# Altium PCB python project v2.0.PcbDoc (part 1 of 2)
Units mil, origin at the board's own origin, x right, y up, seen from the top; angles counter-clockwise.
Board outline 4842.52 x 1803.15 mil, 8 copper layers (L1, L2, L3(GND), L4(PWR), L5(GND), L6, L7, L8), stack 66.302 mil thick; 259 components, 287 nets, 1829 pads, 135 vias.
Unrouted connection lines stored in the file: 99.
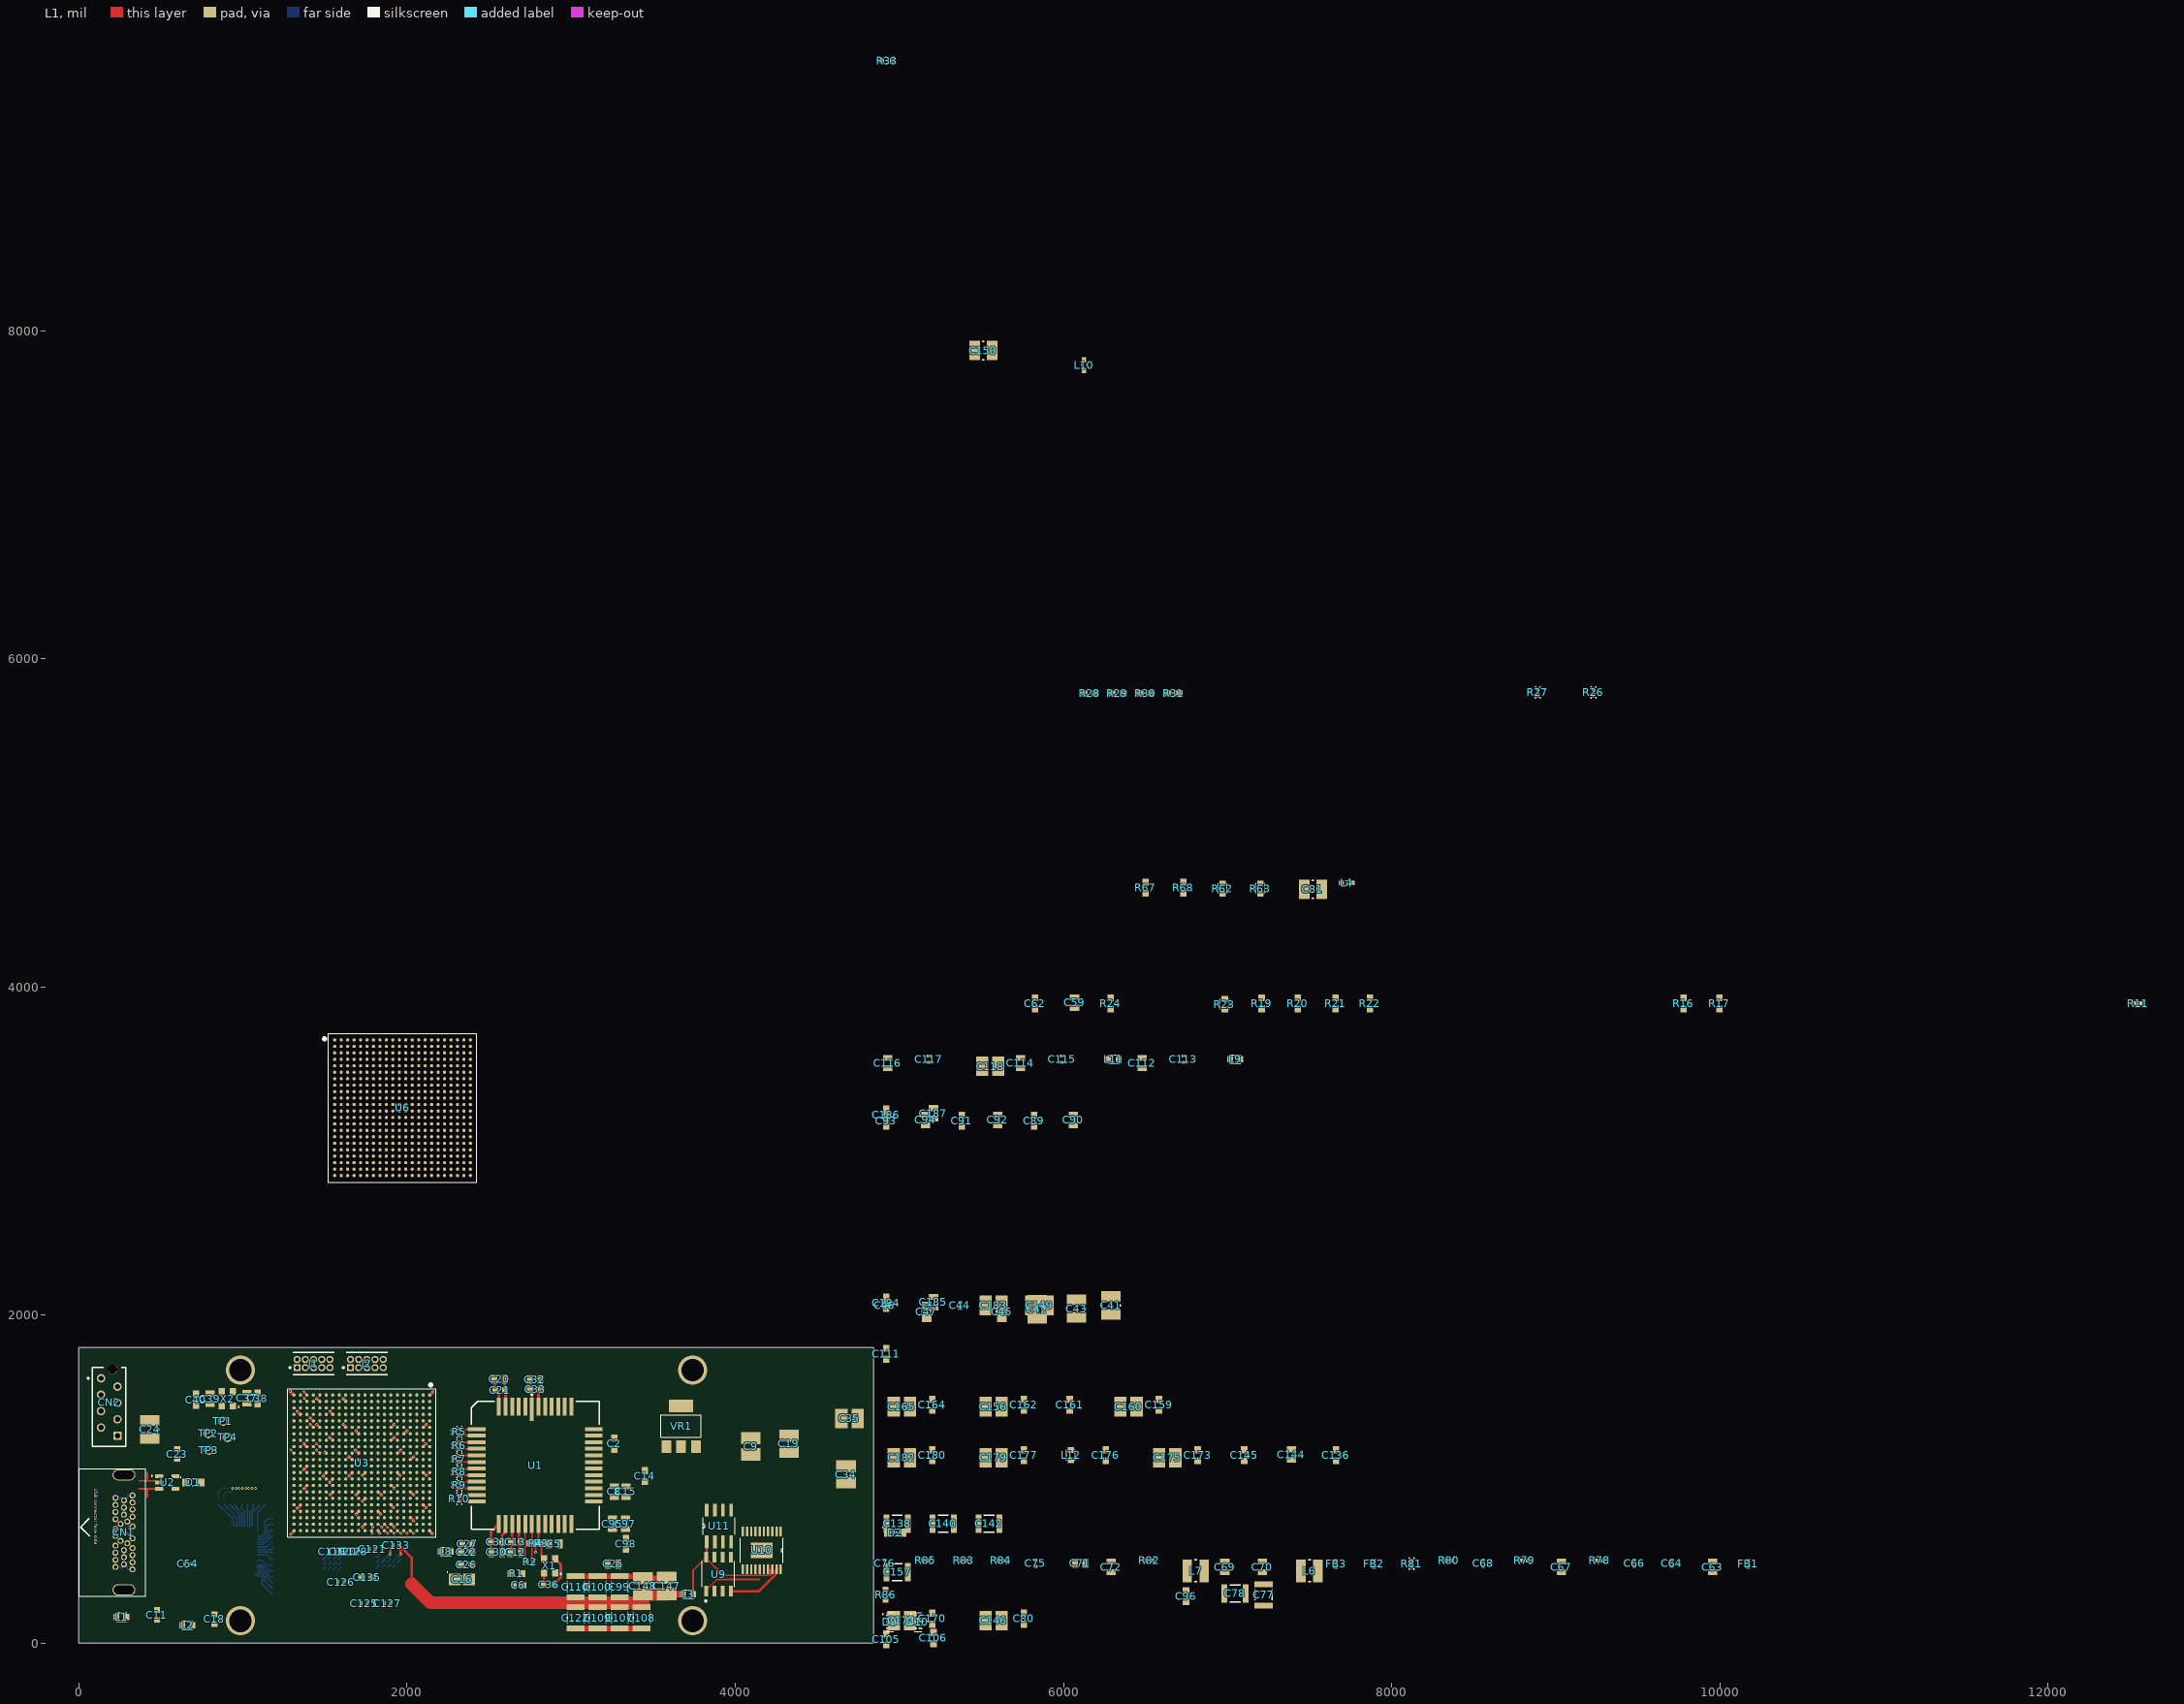
[diagram p0: L1 view]
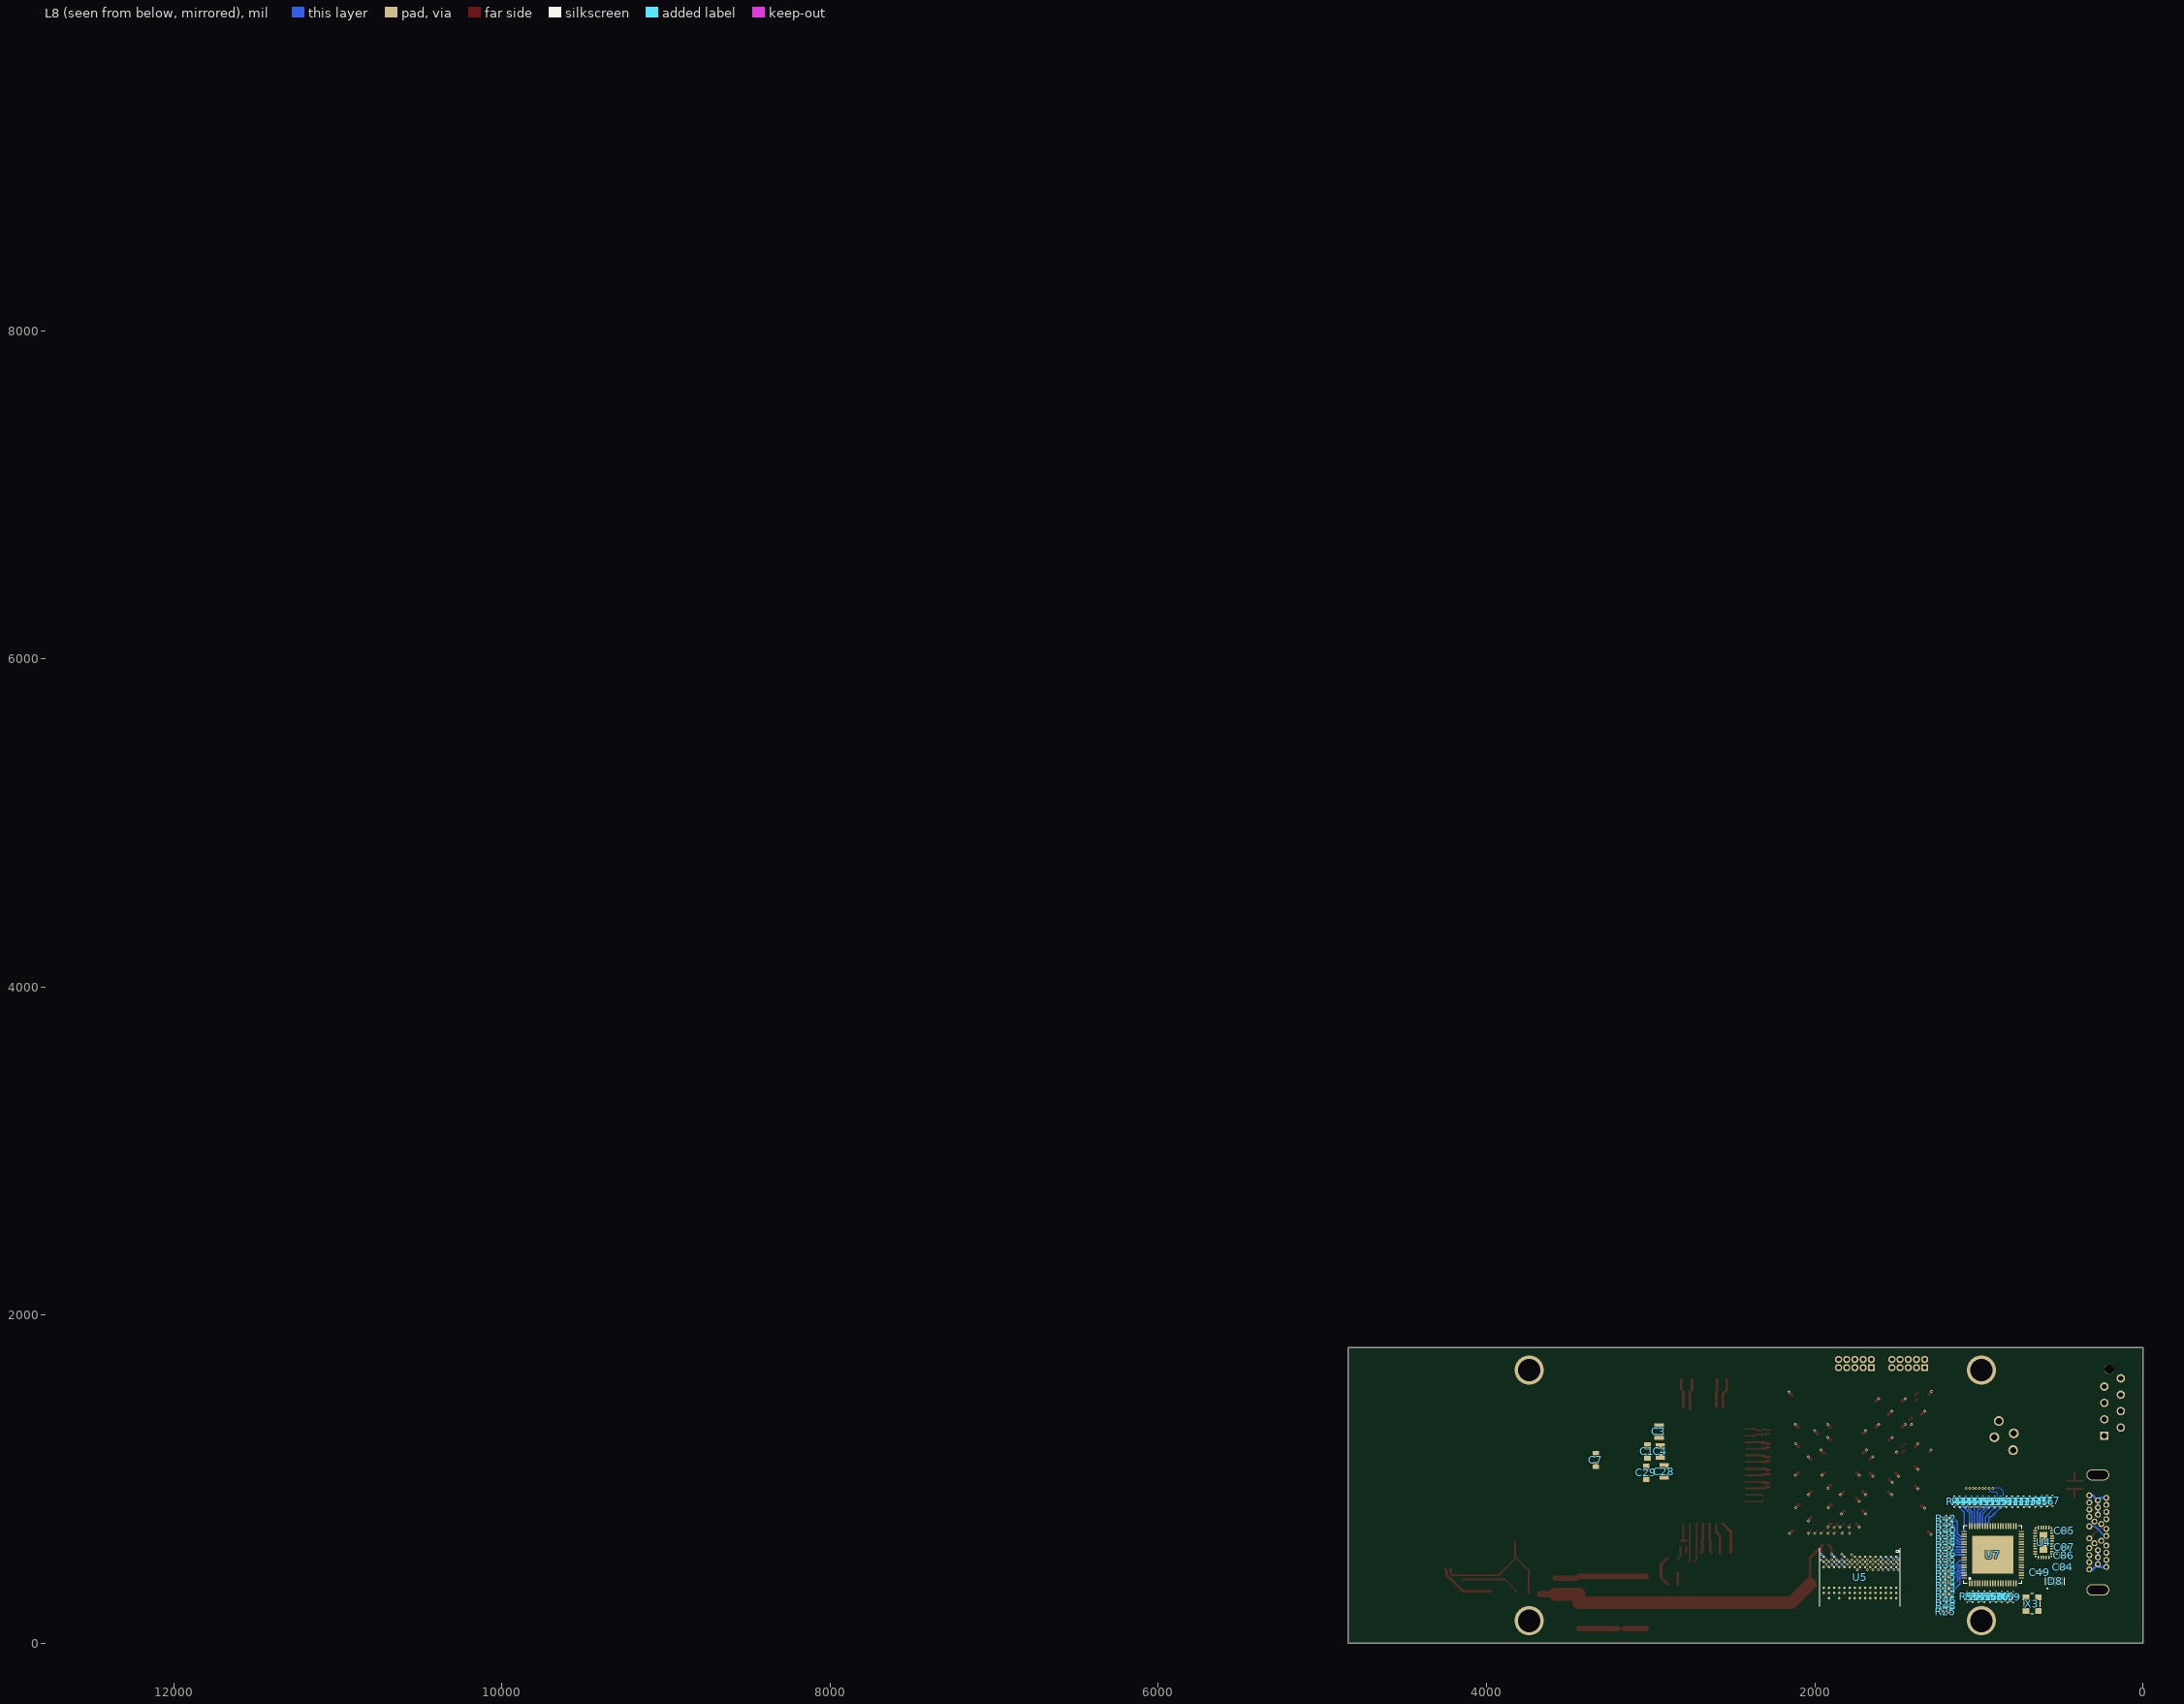
[diagram p1: L8 view, seen from below]
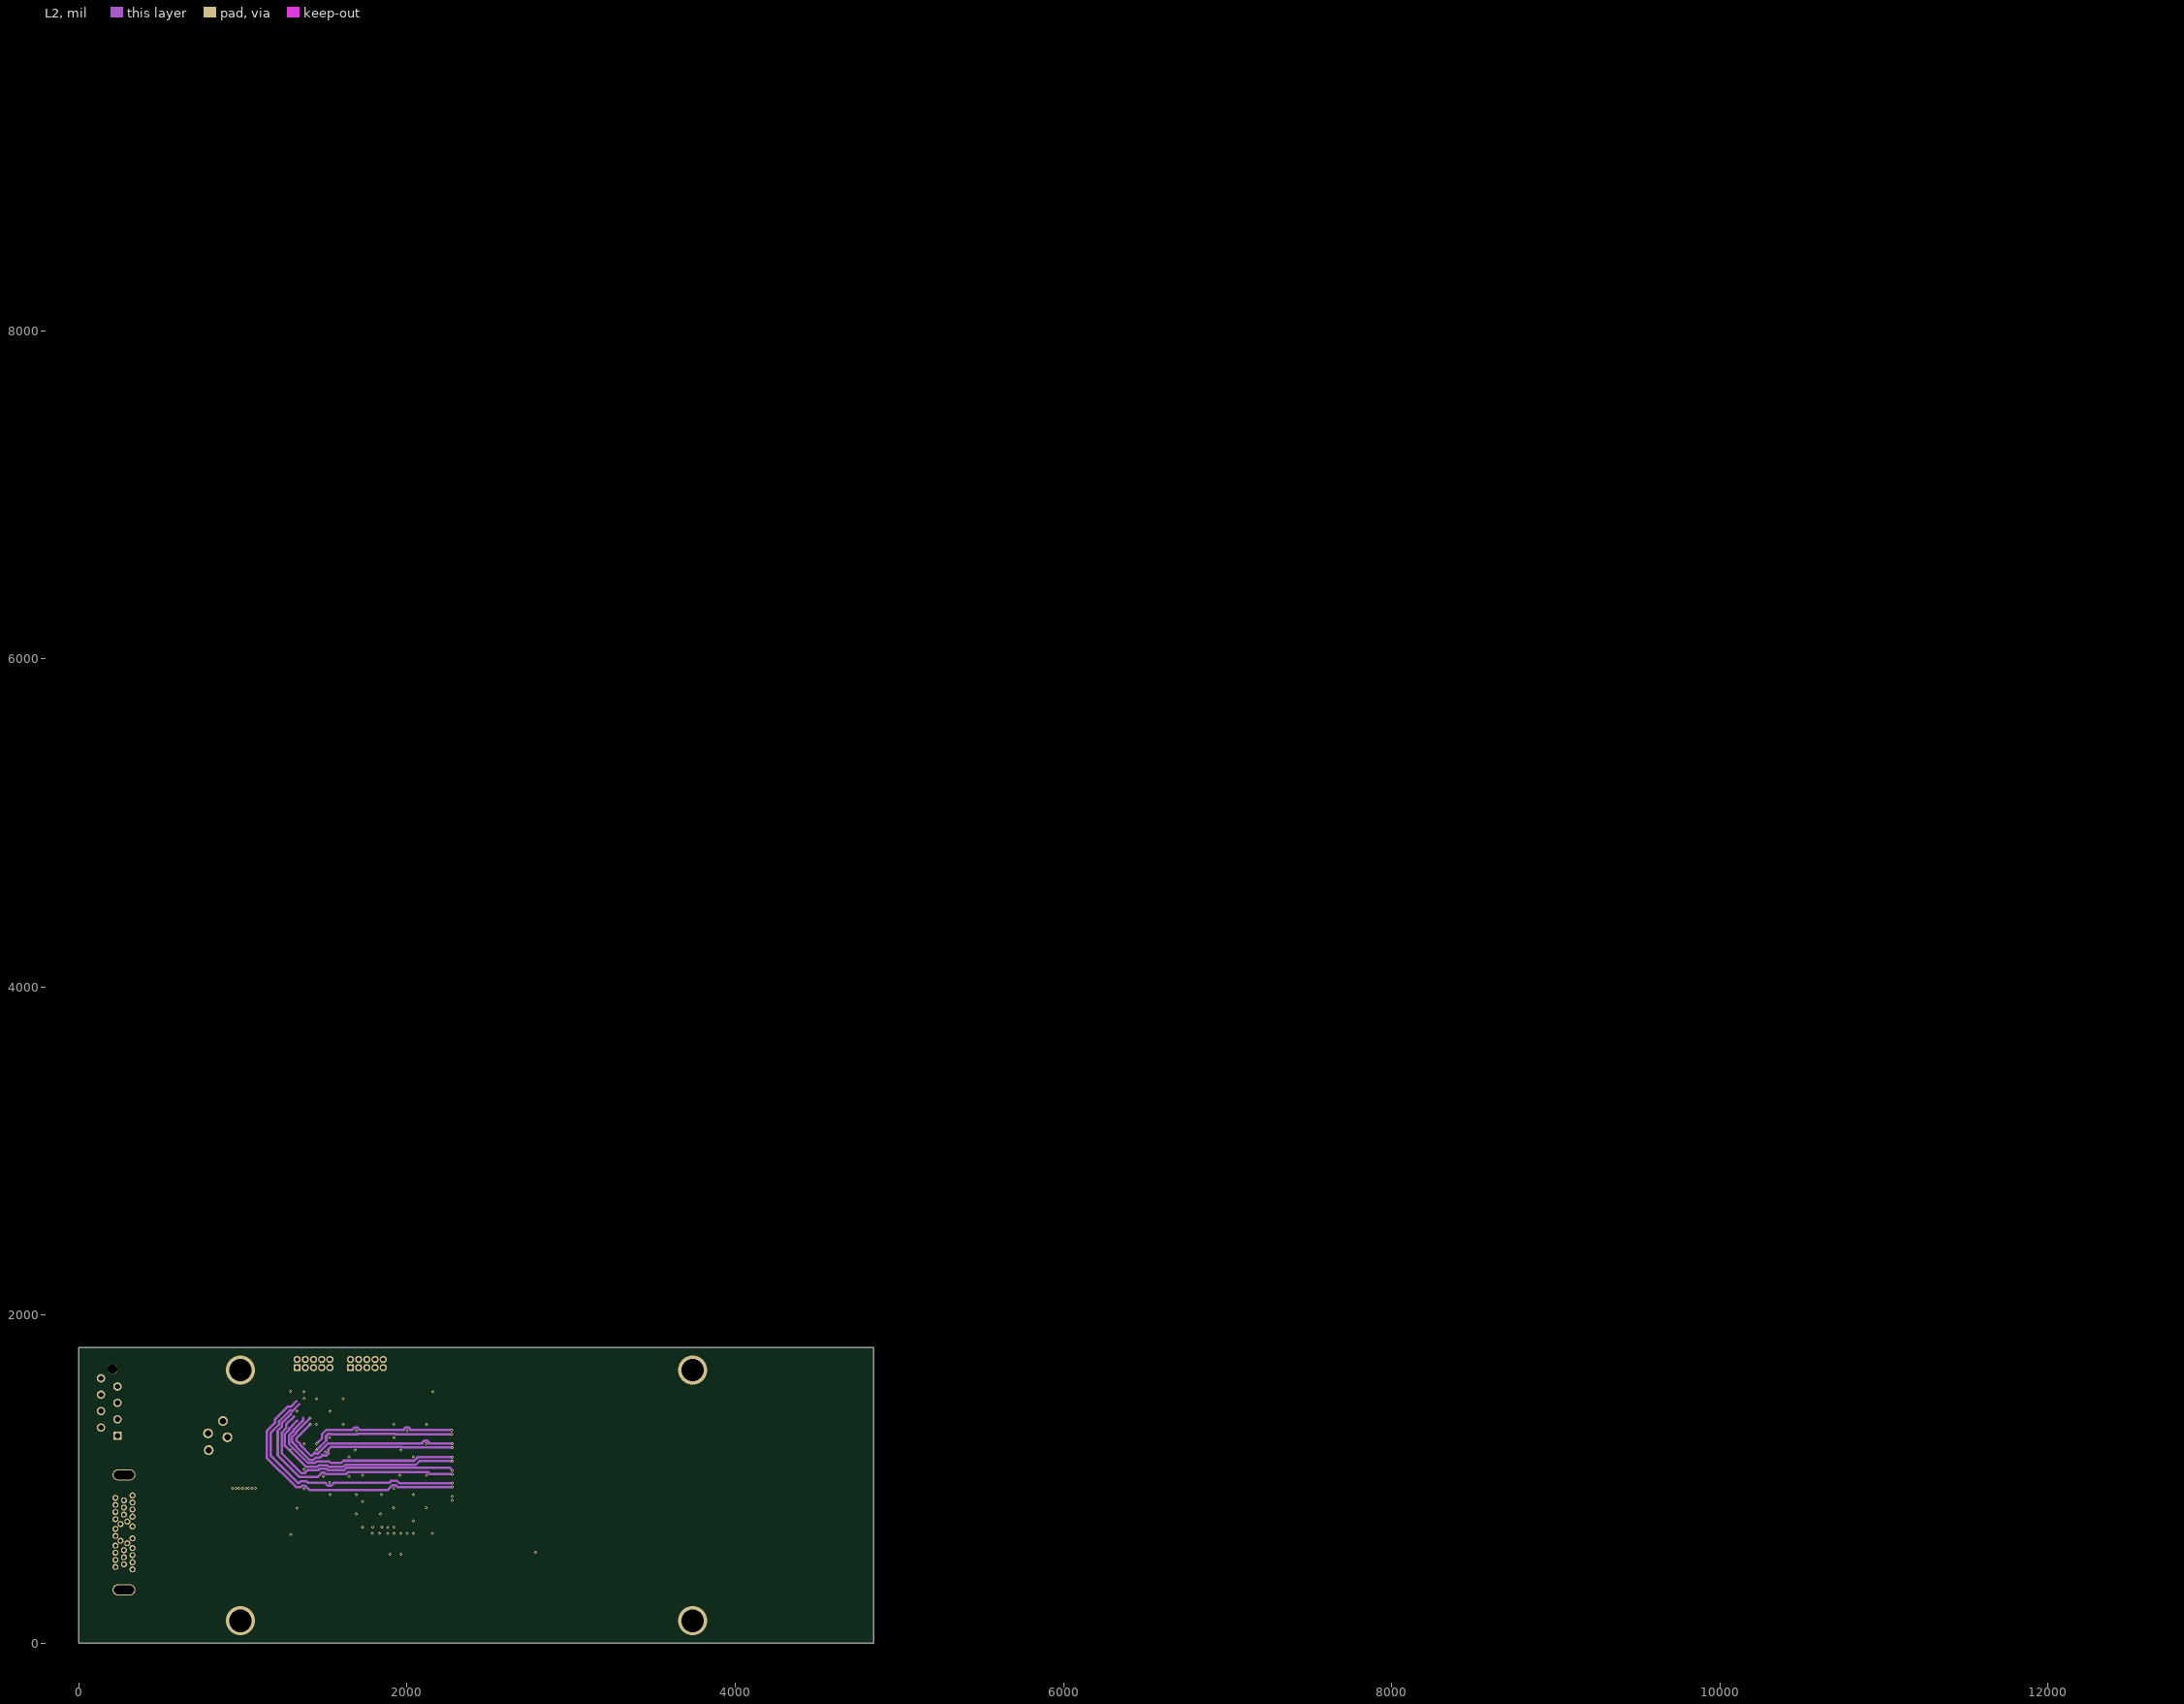
[diagram p2: L2]
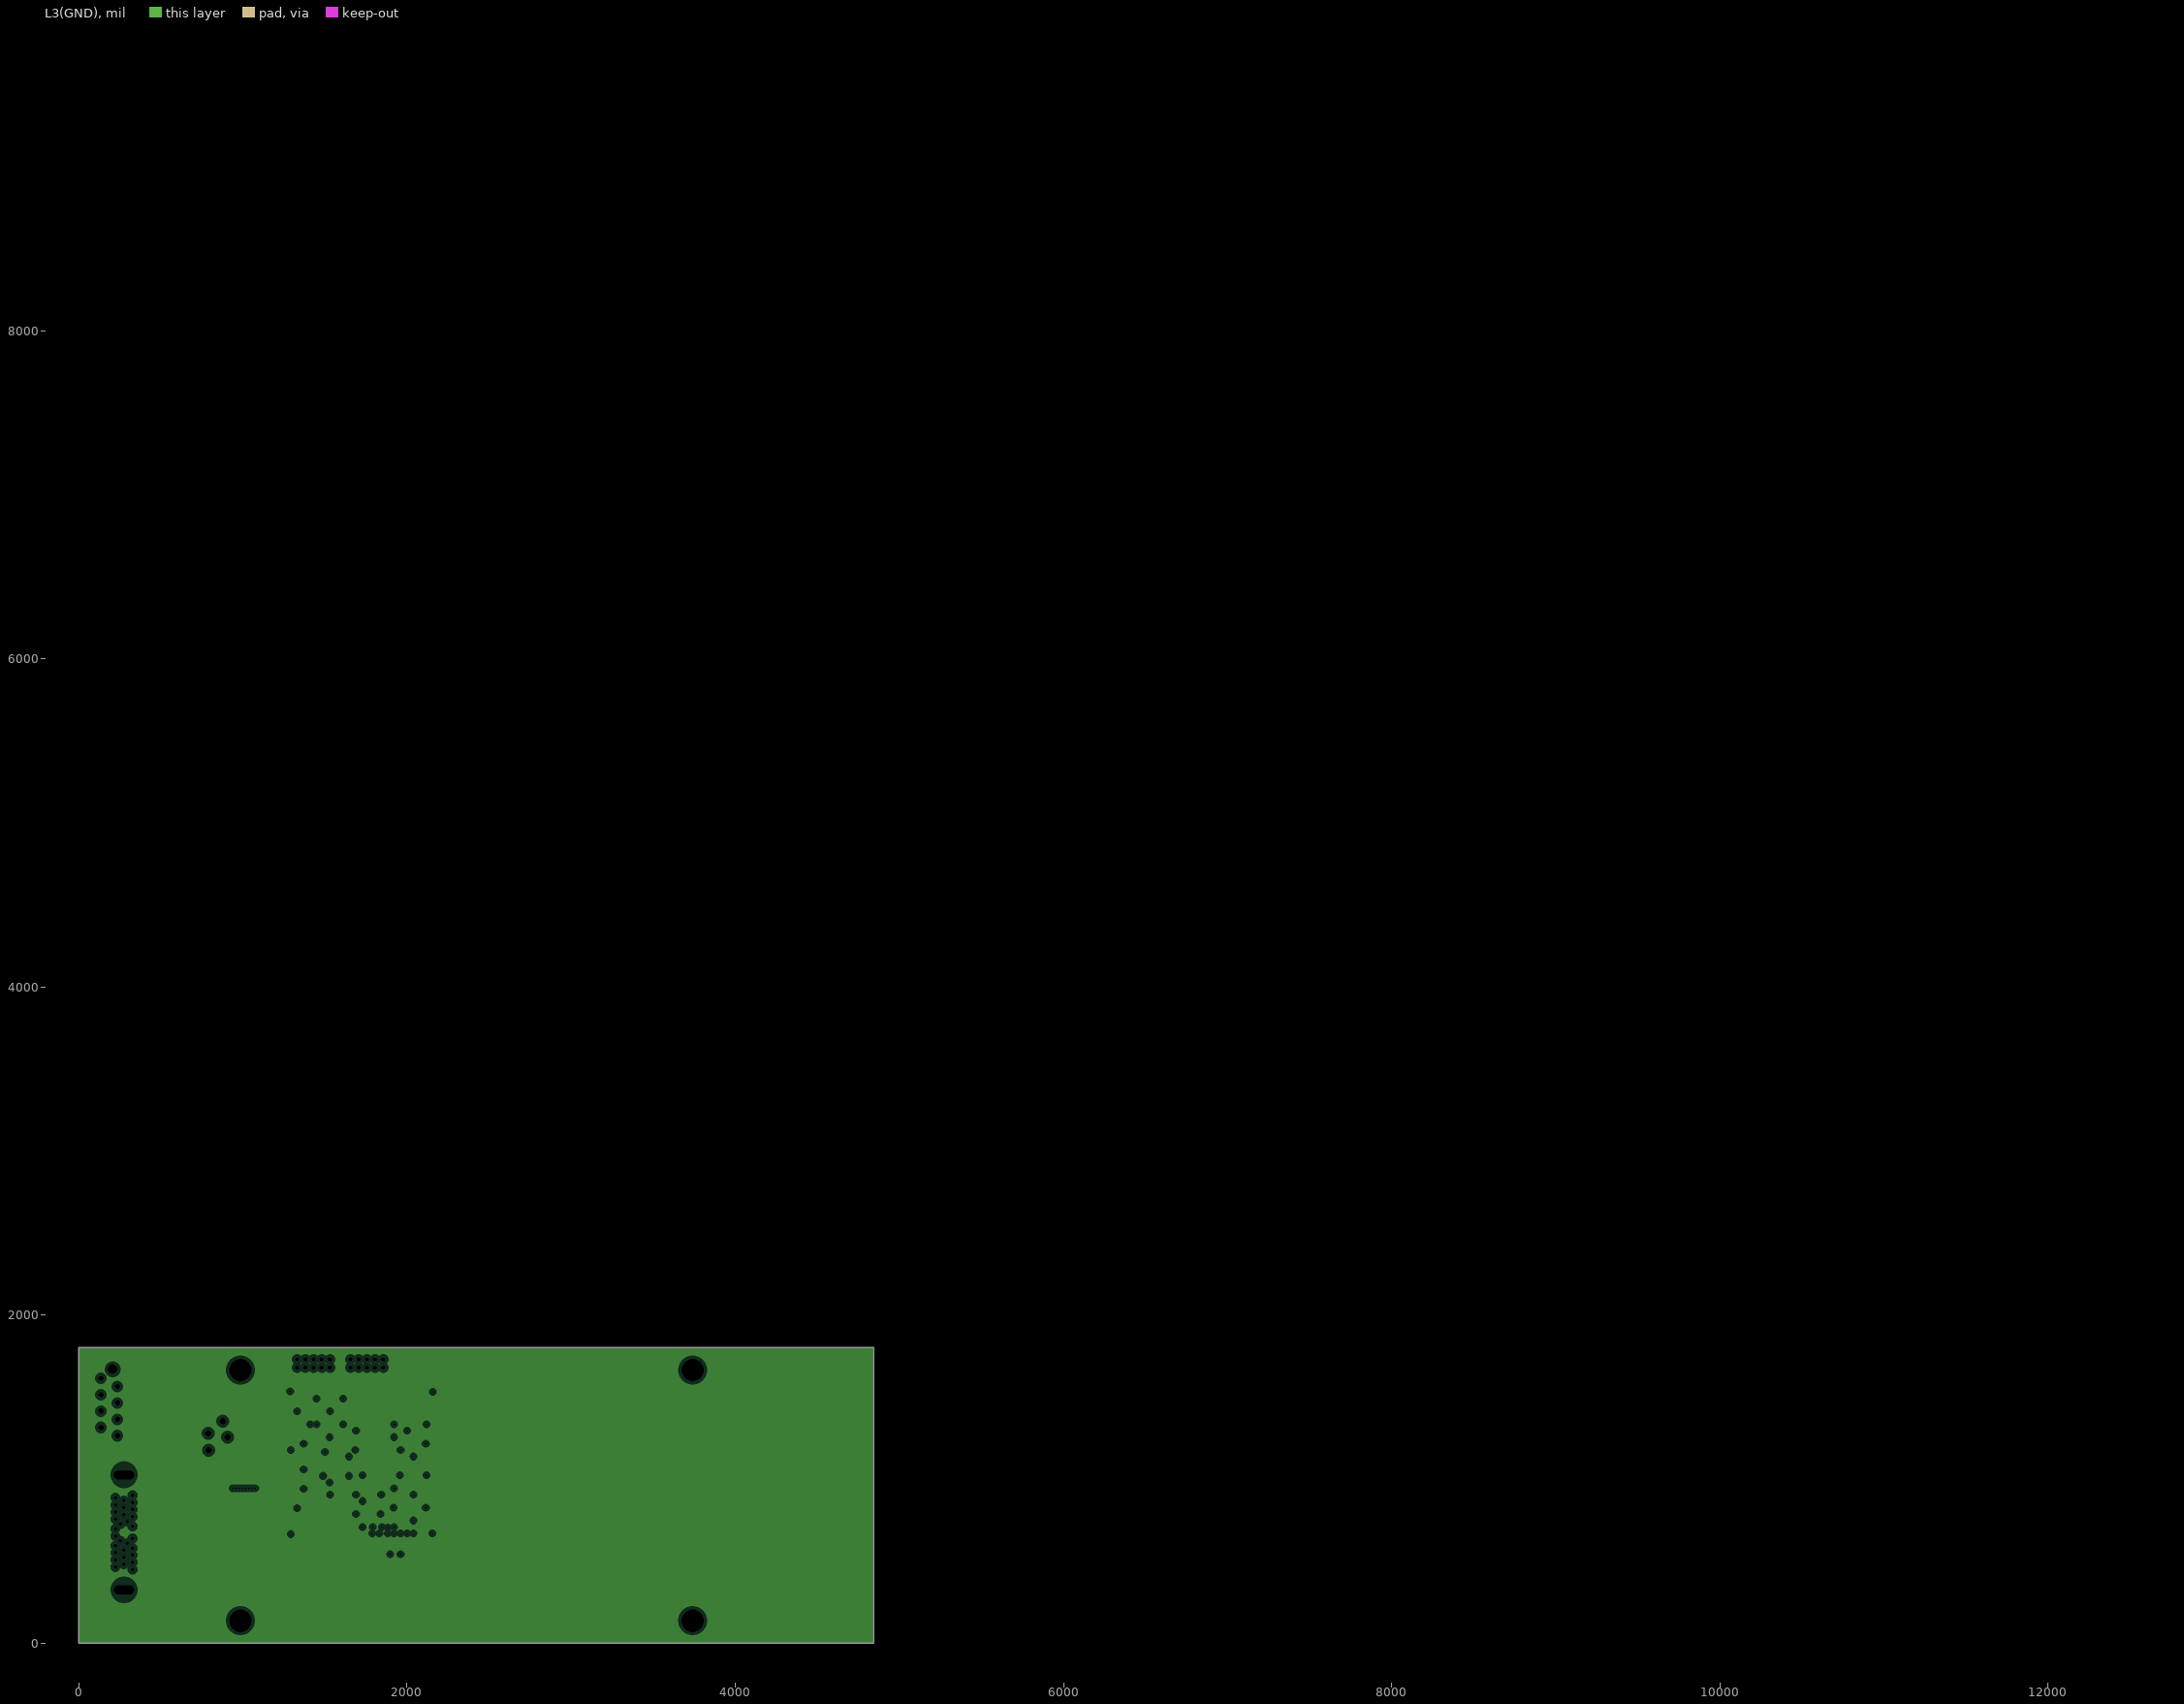
[diagram p3: L3(GND), clearances drawn from the general rule]
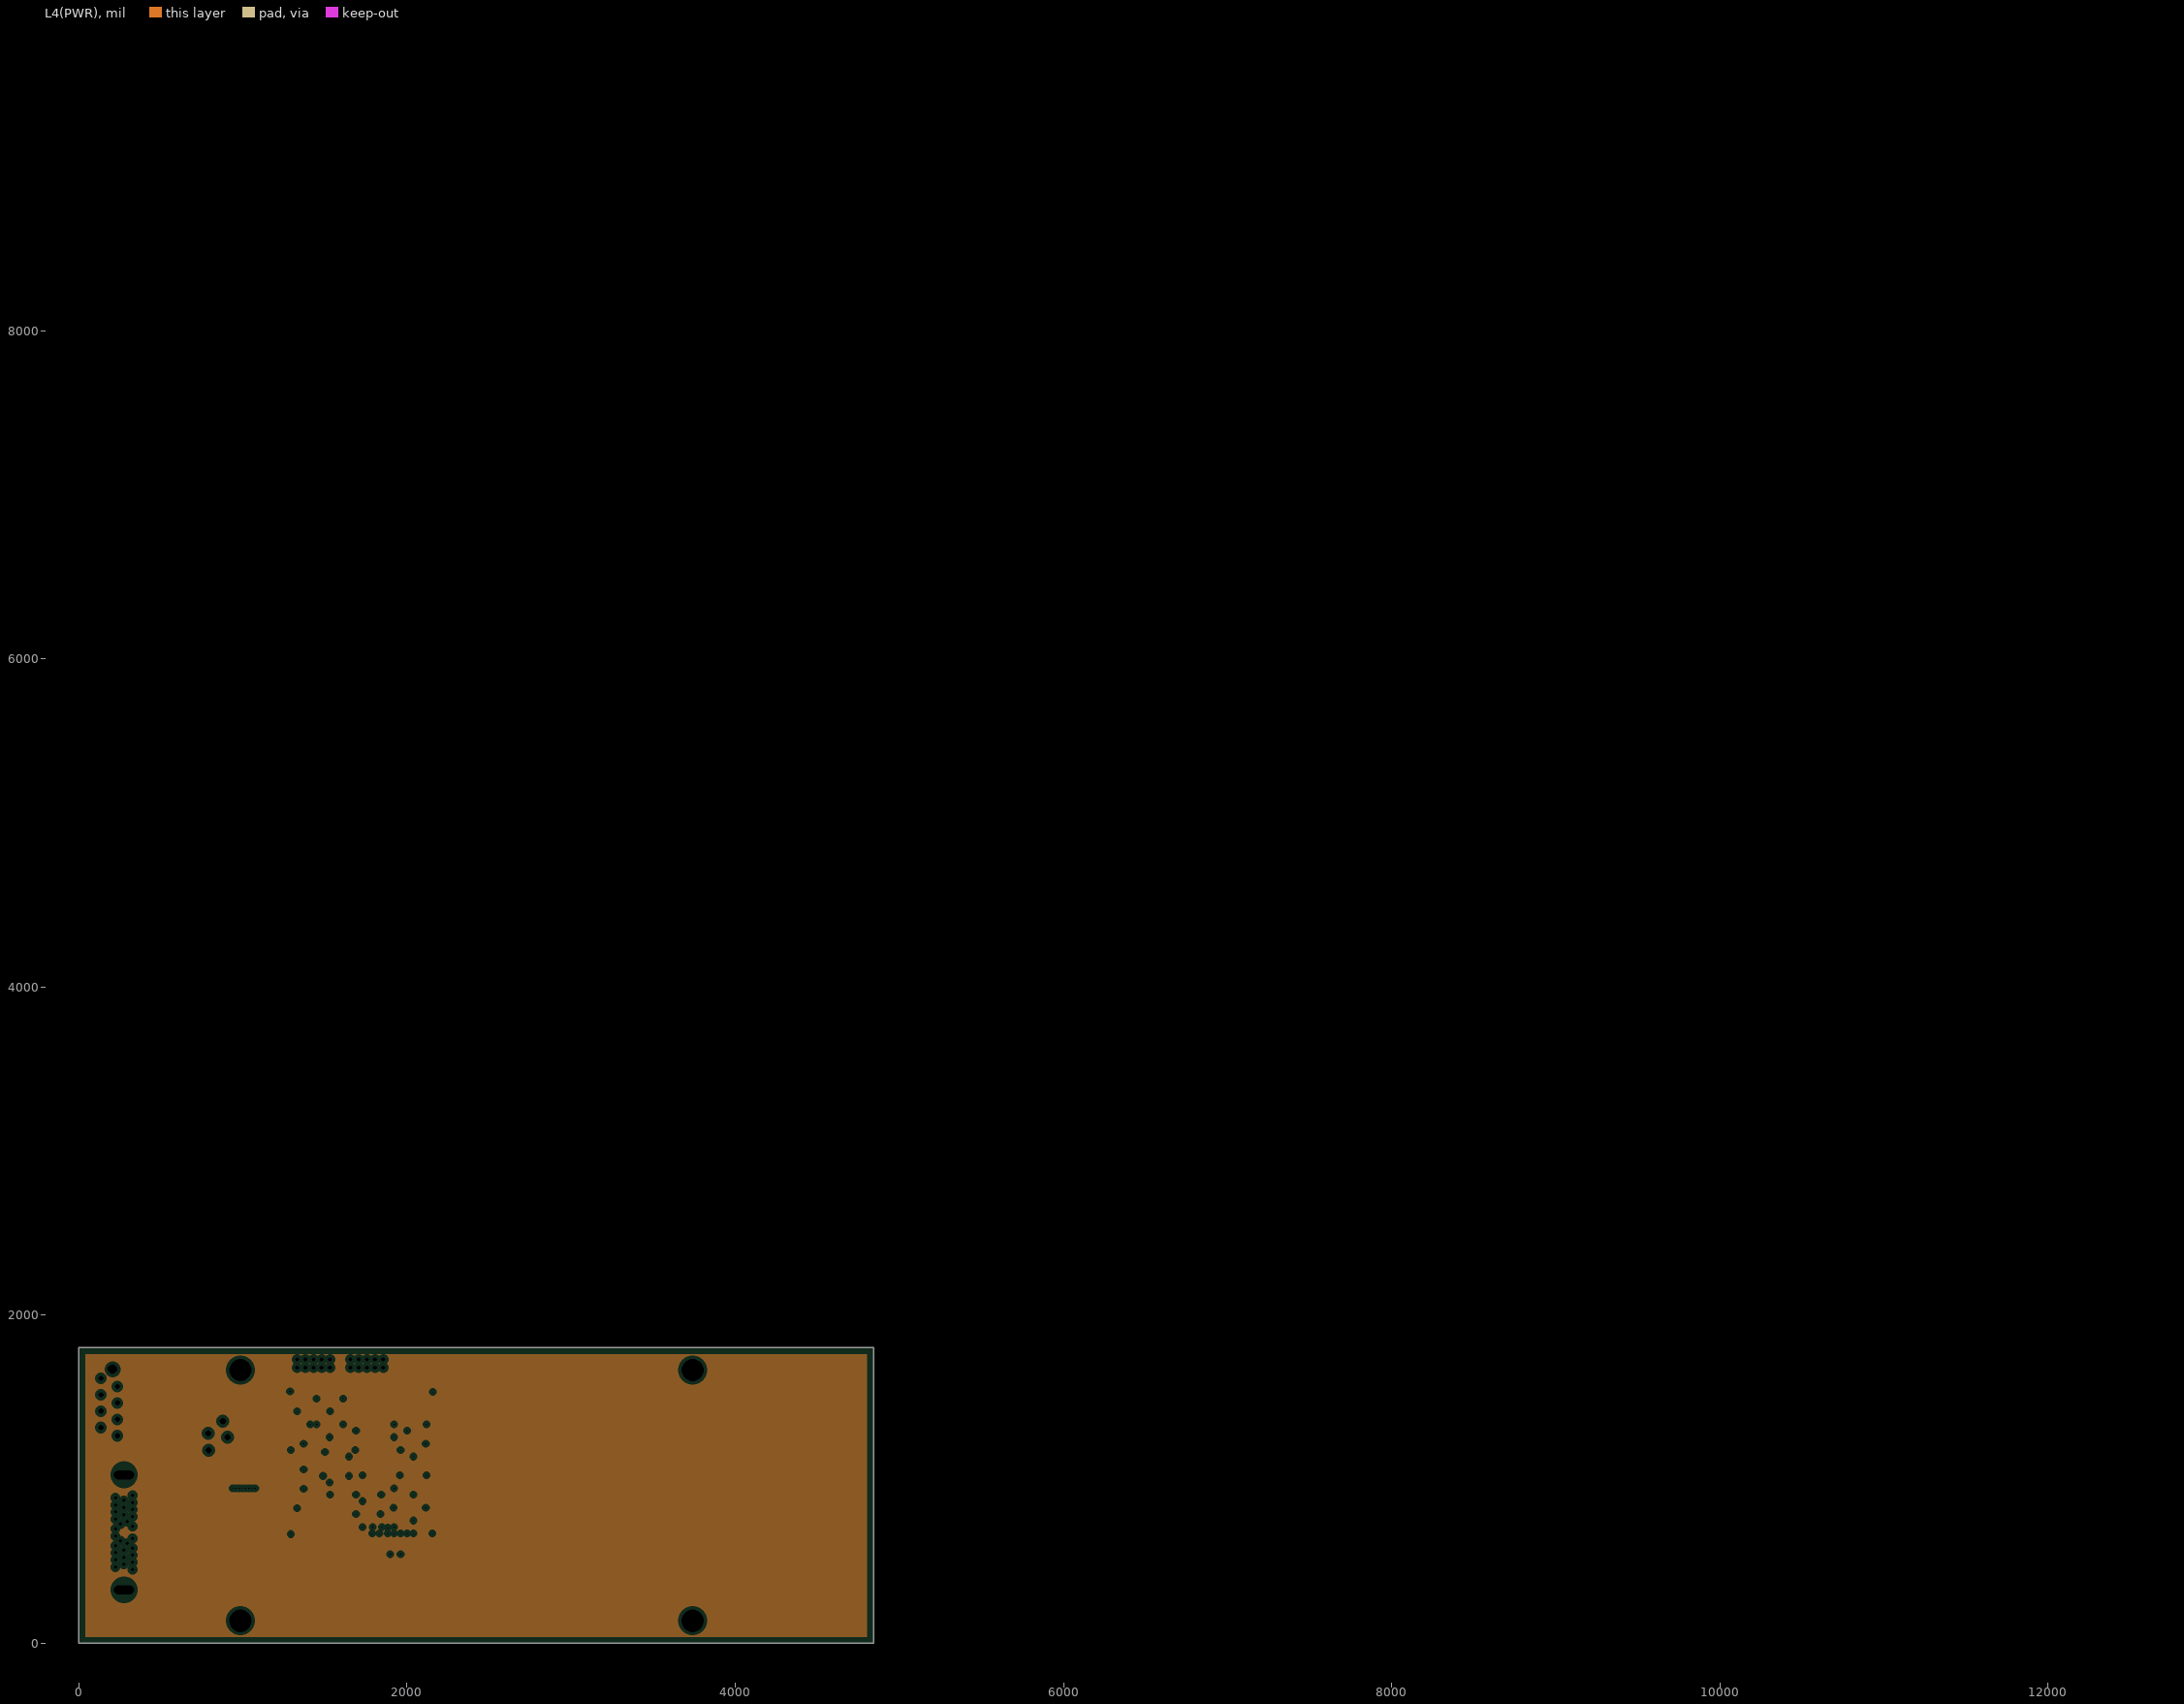
[diagram p4: L4(PWR), clearances drawn from the general rule]
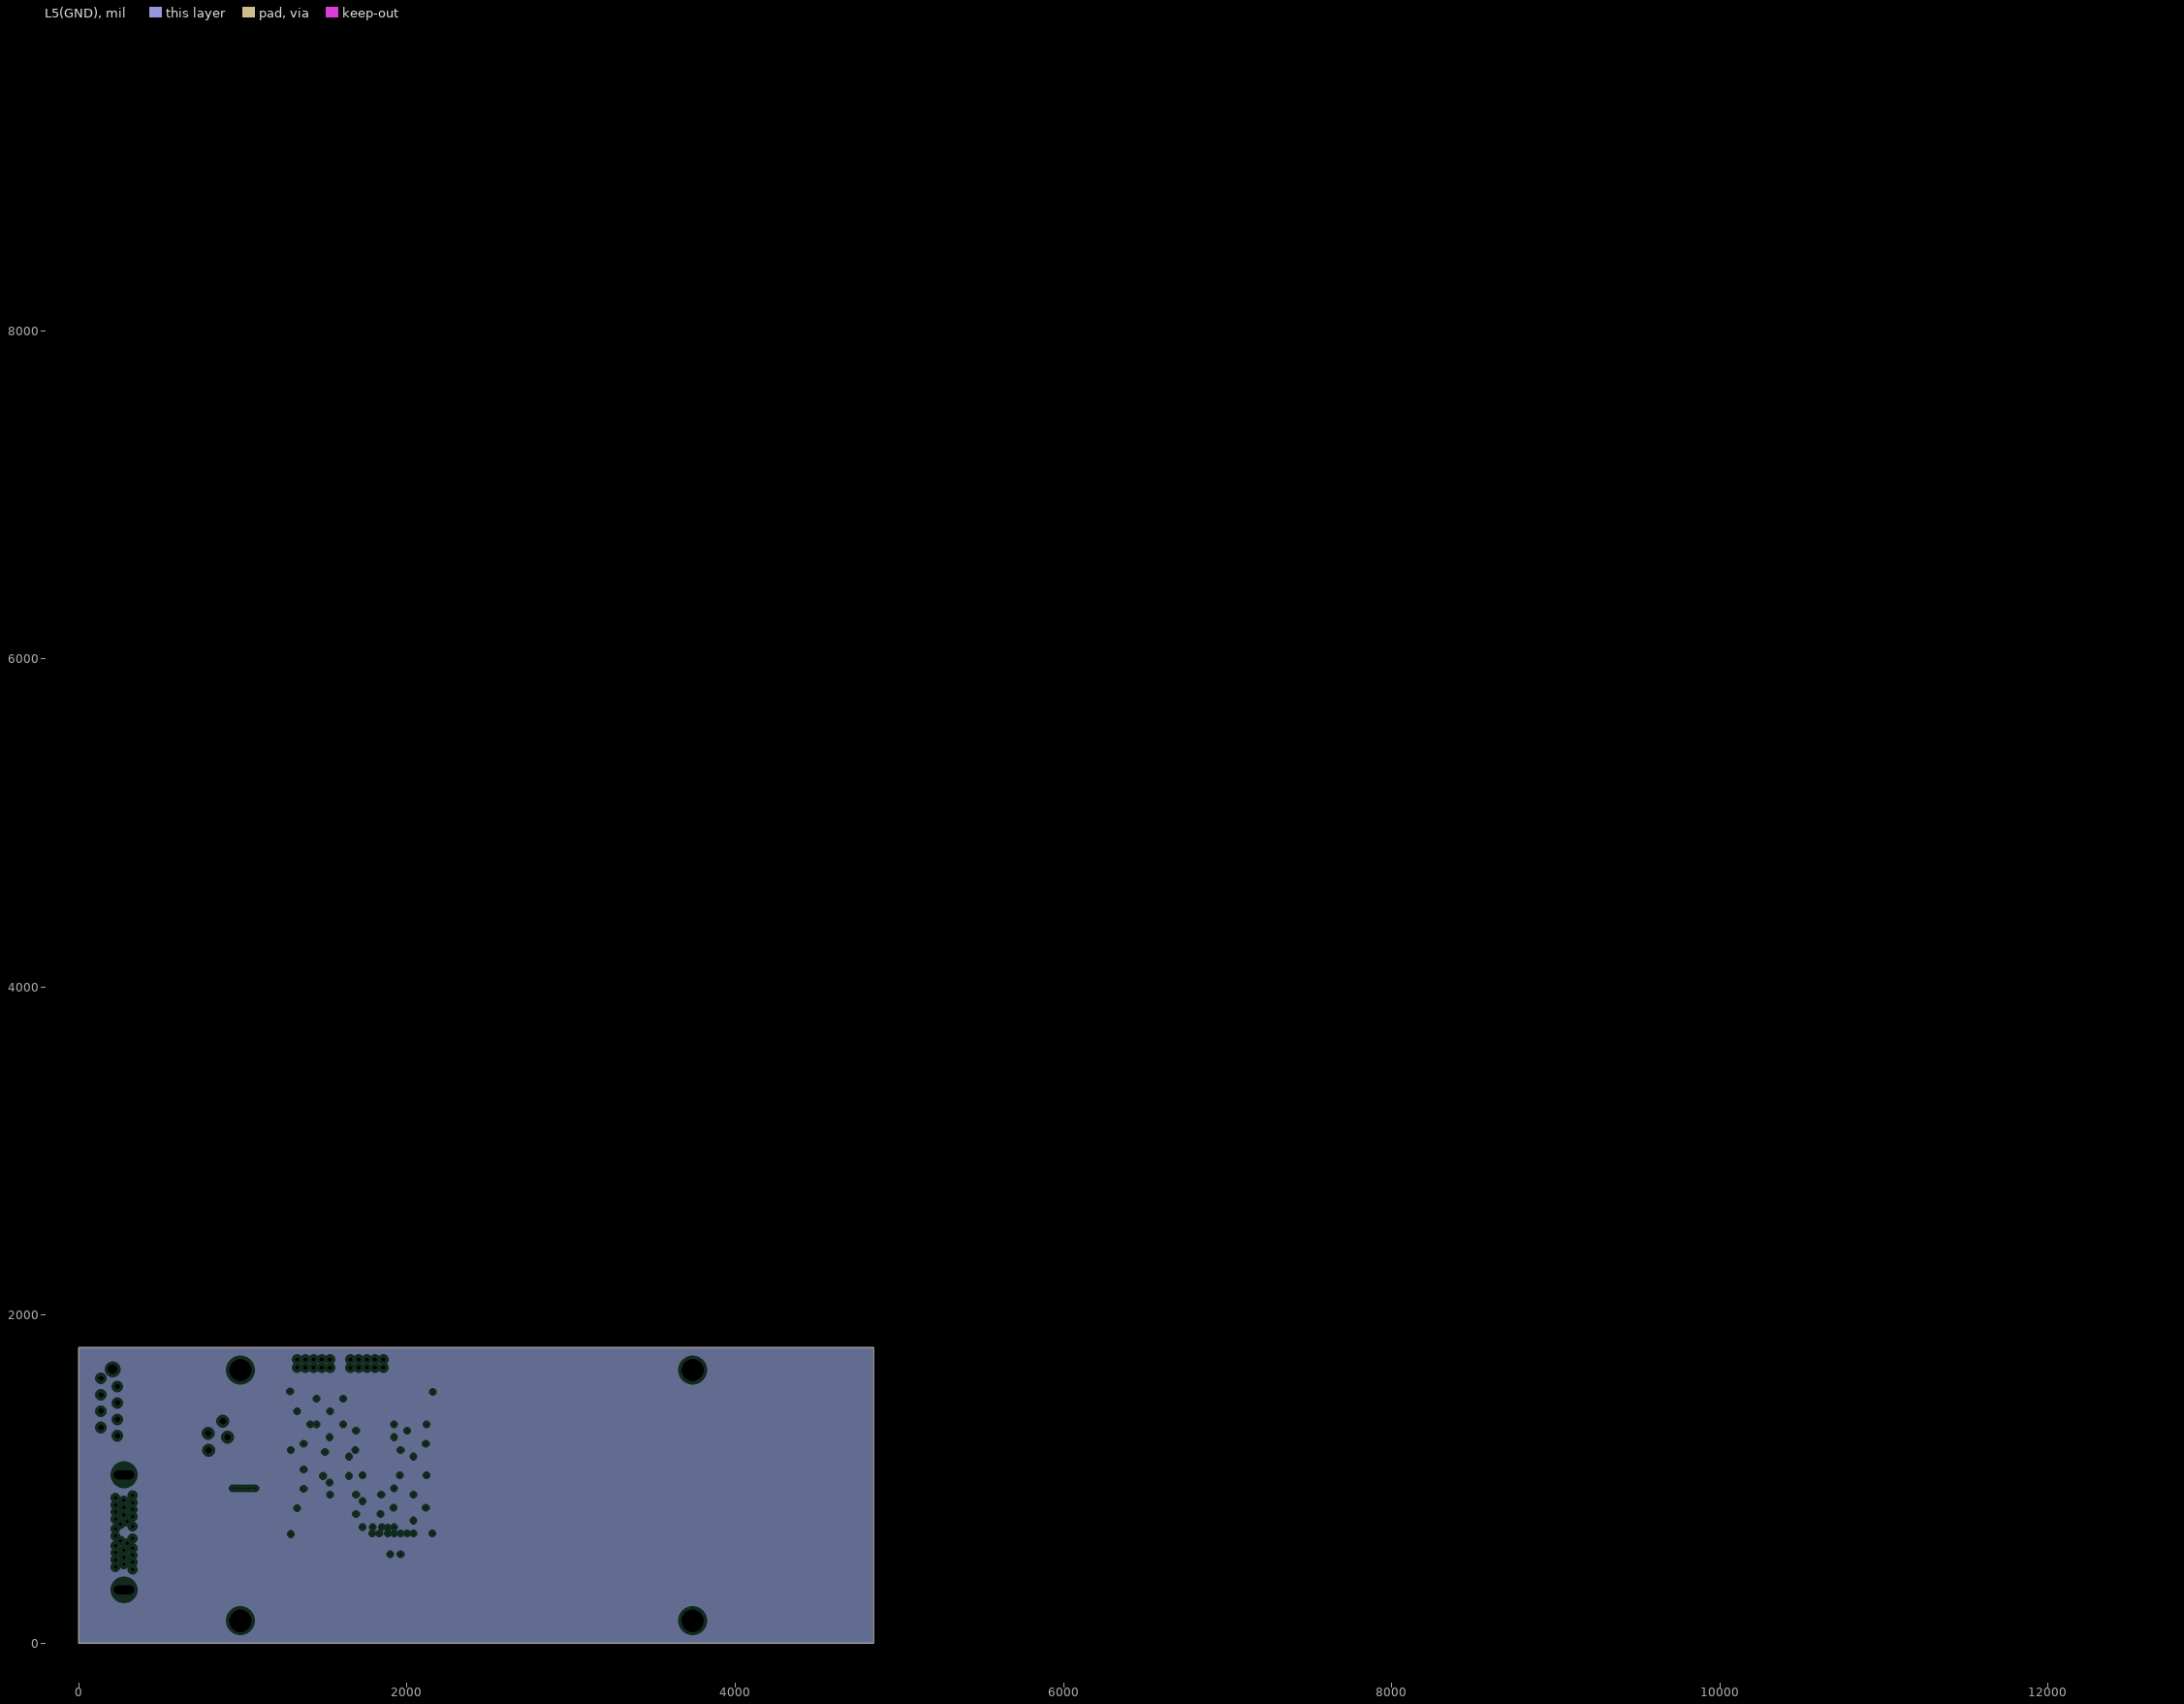
[diagram p5: L5(GND), clearances drawn from the general rule]
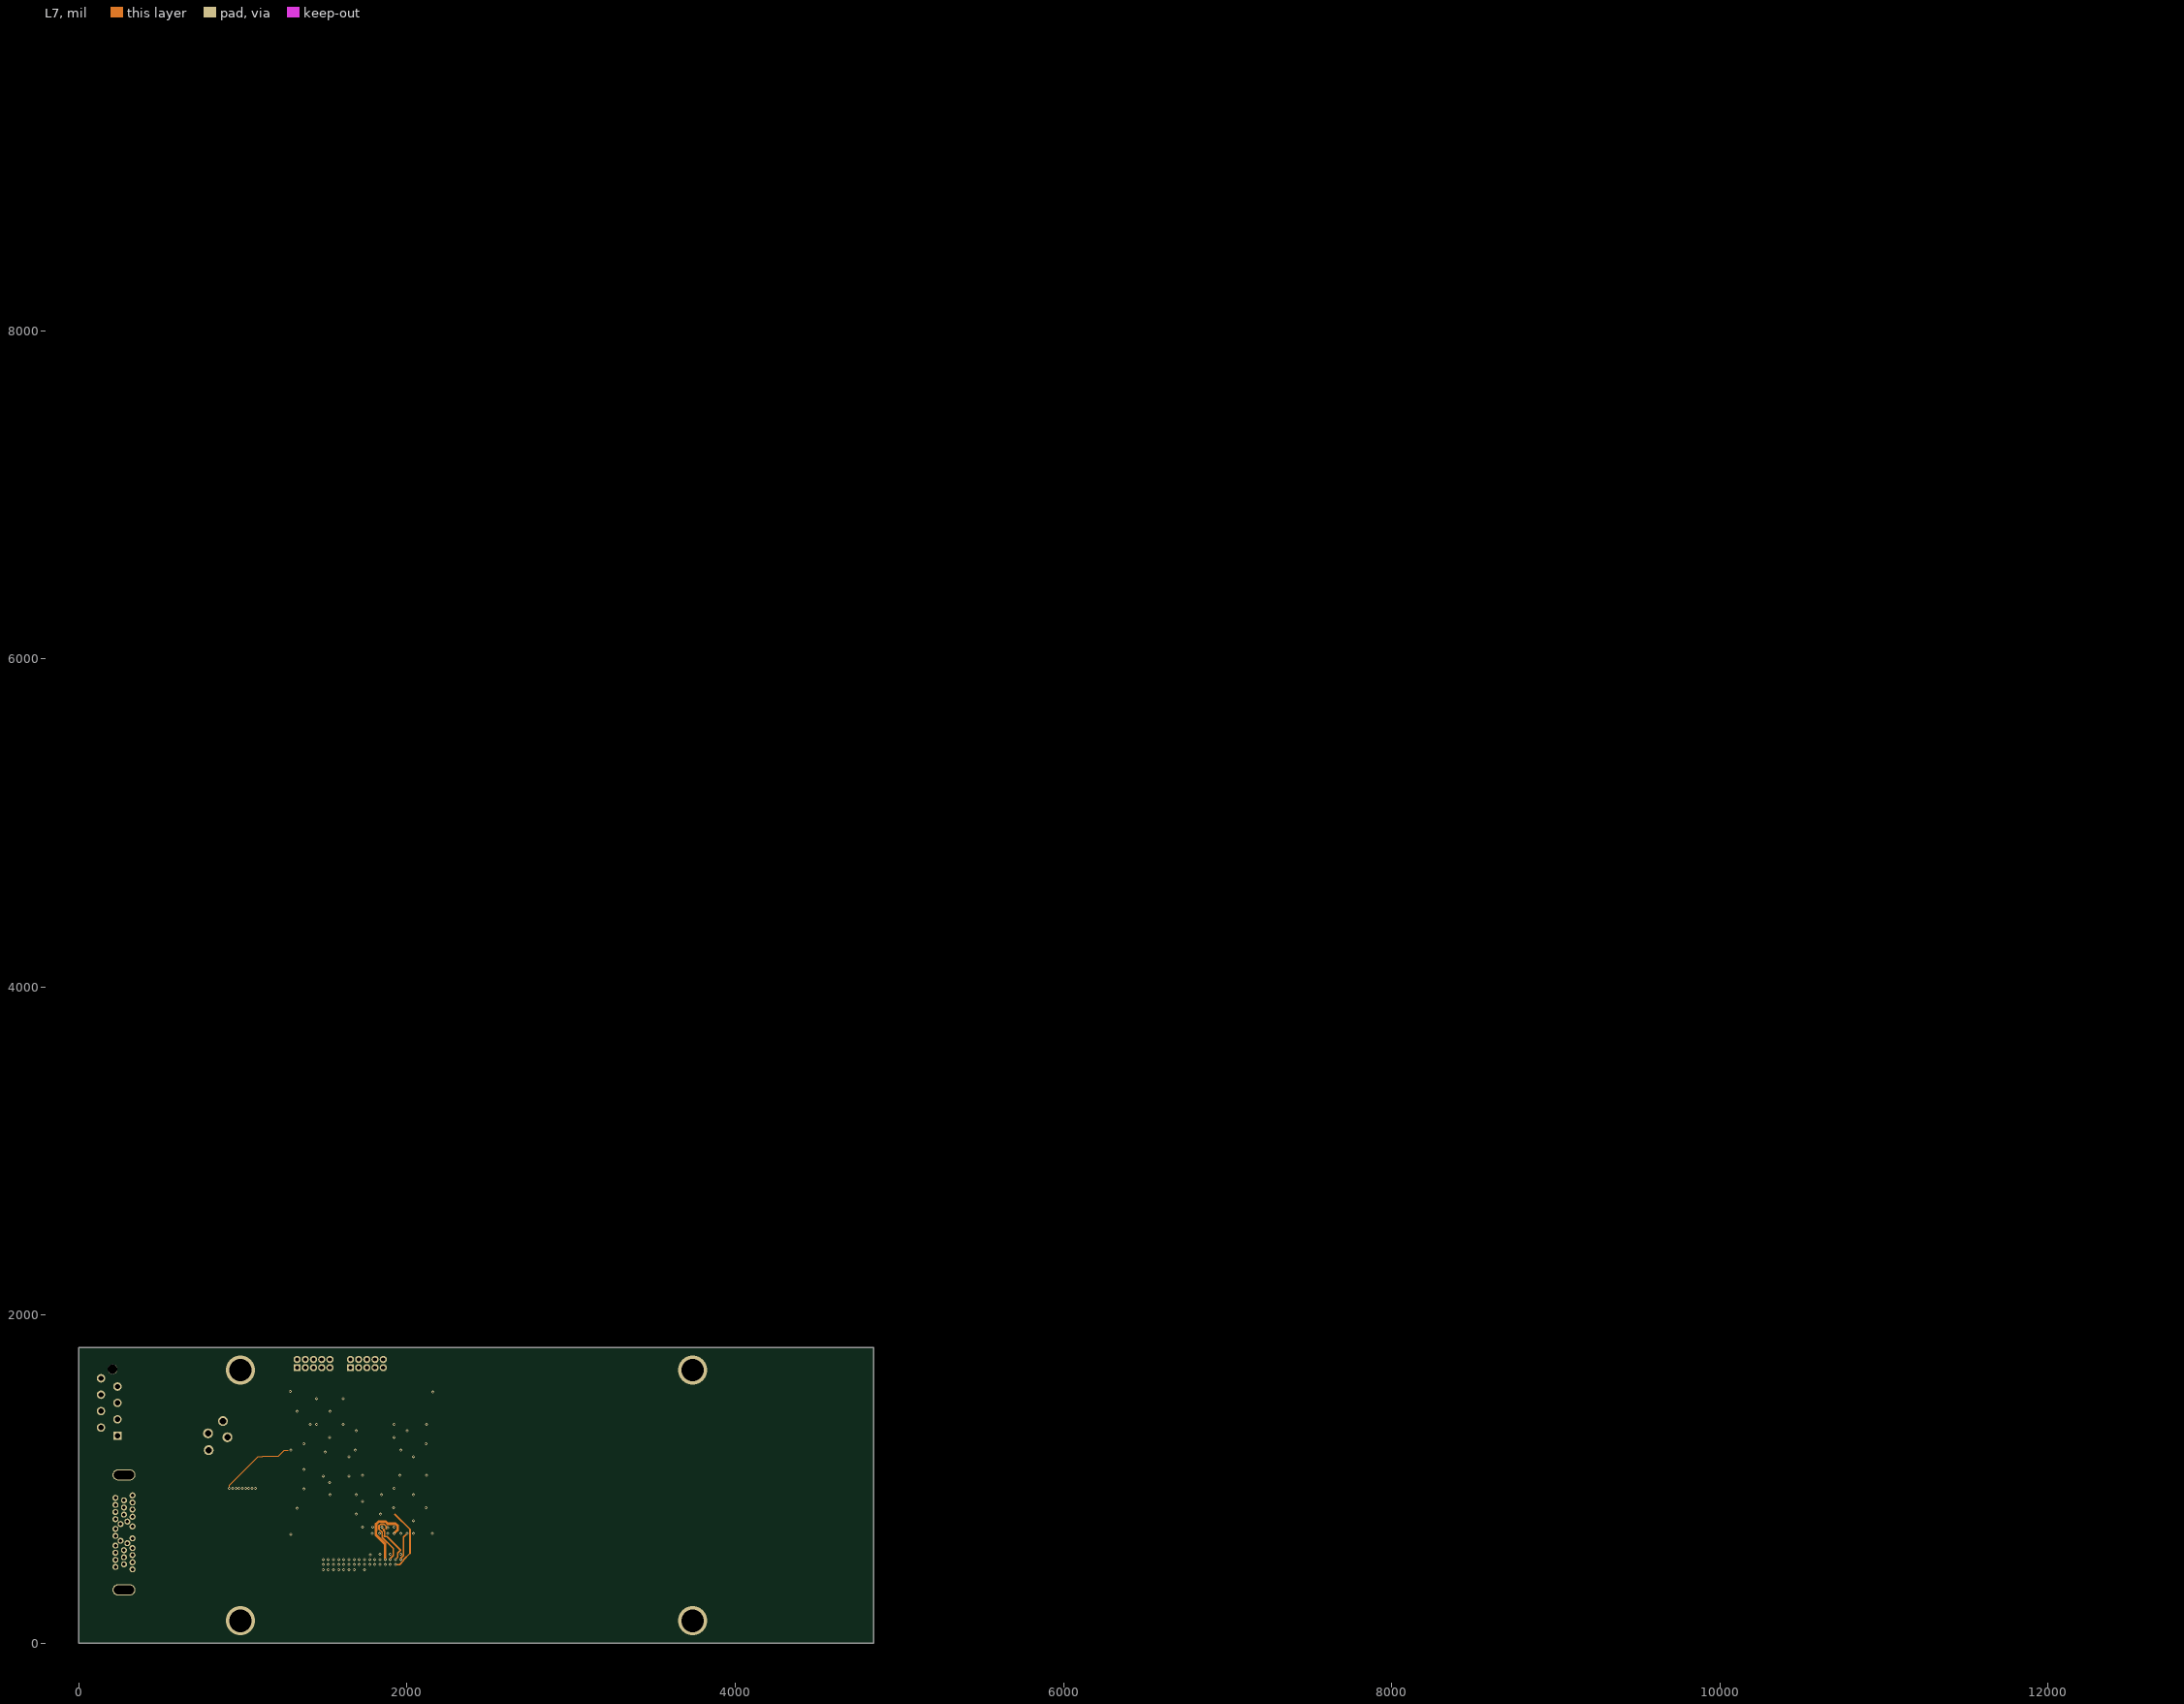
[diagram p6: L7]

## Layer stack, top to bottom
Top Solder: solder mask 0.4, Solder Resist, Dk 3.5
L1: signal copper 1.4
Dielectric 1: core 10, FR-4, Dk 4.2
L2: signal copper 1.417
Dielectric 2: prepreg 5, Dk 4.2
L3(GND): plane copper 1.417
Dielectric 3: core 10, Dk 4.2
L4(PWR): plane copper 1.417
Dielectric 4: prepreg 5, Dk 4.2
L5(GND): plane copper 1.417
Dielectric 5: core 10, Dk 4.2
L6: signal copper 1.417
Dielectric 6: prepreg 5, Dk 4.2
L7: signal copper 1.417
Dielectric 7: core 10, Dk 4.2
L8: signal copper 1.4
Bottom Solder: solder mask 0.4, Solder Resist, Dk 3.5

## Board outline
0,0 4842.52,0 4842.52,1803.15 0,1803.15

## Design rules (kind name [scope] priority, off if disabled: settings)
Clearance [All] p1: gap=3.94 ignorepadtopadclearanceinfootprint=FALSE
DiffPairsRouting [All] p1: maxlimit=10 minlimit=10 mostfreqgap=10 toplayer_minwidth=15 toplayer_maxwidth=15 toplayer_prefwidth=15 midlayer1_minwidth=15 midlayer1_maxwidth=15 midlayer1_prefwidth=15 midlayer2_minwidth=15 midlayer2_maxwidth=15 midlayer2_prefwidth=15 midlayer3_minwidth=15 midlayer3_maxwidth=15 midlayer3_prefwidth=15 bottomlayer_minwidth=15 bottomlayer_maxwidth=15 bottomlayer_prefwidth=15 maxuncoupledlength=500
PlaneClearance [All] p1: clearance=20
PlaneConnect [All] p1: planeconnectstyle=Relief reliefexpansion=20 reliefentries=4 reliefconductorwidth=10 reliefairgap=10
PolygonConnect [All] p1: connectstyle=Relief reliefconductorwidth=10 reliefentries=4 polygonreliefangle="90 Angle" airgapwidth=10
RoomDefinition Sheet1 [InComponentClass('Sheet1')] p1: confinementstyle=ConfineIn formatcopy=TRUE lockcomponents=FALSE outline 4888.49,2288.34 6447.54,2288.34 6447.54,3390.7 4888.49,3390.7
RoomDefinition [08]-DDR2_FPGA_INTERFACE [InComponentClass('[08]-DDR2_FPGA_INTERFACE')] p2: confinementstyle=ConfineIn formatcopy=TRUE lockcomponents=FALSE outline 4888.49,1363.14 6794,1363.14 6794,1622.99 4888.49,1622.99
RoomDefinition [06]-DDR2_INTERFACE [InComponentClass('[06]-DDR2_INTERFACE')] p3: confinementstyle=ConfineIn formatcopy=TRUE lockcomponents=FALSE outline -2080,-1940 -80,-1940 -80,-940 -2080,-940
RoomDefinition V2_FPGA_POWER_SUPPLY [InComponentClass('V2_FPGA_POWER_SUPPLY')] p4: confinementstyle=ConfineIn formatcopy=TRUE lockcomponents=FALSE outline 4888.49,351.33 10317.61,351.33 10317.61,630.86 4888.49,630.86
RoomDefinition FPGA_BANK_7_8 [InComponentClass('FPGA_BANK_7_8')] p5: confinementstyle=ConfineIn formatcopy=TRUE lockcomponents=FALSE outline 4890,860 14685,860 14685,9780 4890,9780
RoomDefinition DDR2_POWER_SUPPLY [InComponentClass('DDR2_POWER_SUPPLY')] p6: confinementstyle=ConfineIn formatcopy=TRUE lockcomponents=FALSE outline 4890,4820 8810,4820 8810,9540 4890,9540
RoomDefinition [11]-SDCARD_TESTPOINTS_EXT_SPI_INTERFACE [InComponentClass('[11]-SDCARD_TESTPOINTS_EXT_SPI_INTERFACE')] p7: confinementstyle=ConfineIn formatcopy=TRUE lockcomponents=FALSE outline 4890,7020 6575,7020 6575,7960 4890,7960
RoomDefinition [07]-FPGA_BANK_5 [InComponentClass('[07]-FPGA_BANK_5')] p8: confinementstyle=ConfineIn formatcopy=TRUE lockcomponents=FALSE outline 4890,860 14685,860 14685,9780 4890,9780
RoomDefinition [6]-USB_C_MUX_INTERFACE [InComponentClass('[6]-USB_C_MUX_INTERFACE')] p9: confinementstyle=ConfineIn formatcopy=TRUE lockcomponents=FALSE outline 4885,3870 7795,3870 7795,4770 4885,4770
RoomDefinition [05]-FT601_FPGA_INTERFACE_0 [InComponentClass('[05]-FT601_FPGA_INTERFACE_0')] p10: confinementstyle=ConfineIn formatcopy=TRUE lockcomponents=FALSE outline 5797.5,1005 15366.14,1005 15366.14,5728.35 5797.5,5728.35
RoomDefinition [05]-FT601_FPGA_INTERFACE [InComponentClass('[05]-FT601_FPGA_INTERFACE')] p11: confinementstyle=ConfineIn formatcopy=TRUE lockcomponents=FALSE outline 4890,2250 7250,2250 7250,3350 4890,3350
RoomDefinition [04]-PYTHON_FPGA_MAX_25_INTERFACE [InComponentClass('[04]-PYTHON_FPGA_MAX_25_INTERFACE')] p12: confinementstyle=ConfineIn formatcopy=TRUE lockcomponents=FALSE outline 4885,1100 9670,1100 9670,2200 4885,2200
RoomDefinition [03]-PYTHON500_INTERFACE [InComponentClass('[03]-PYTHON500_INTERFACE')] p13: confinementstyle=ConfineIn formatcopy=TRUE lockcomponents=FALSE outline 4910,45 14705,45 14705,9765 4910,9765
RoutingVias [All] p1: holewidth=5.91 width=11.81 viastyle="Through Hole" minholewidth=5.91 minwidth=11.81 maxholewidth=5.91 maxwidth=11.81
SolderMaskExpansion [All] p1: expansion=4
Width [All] p1: maxlimit=157.48 minlimit=3.94 preferedwidth=3.94
27 further rules are at their usual default settings.

## Classes and differential pairs
net class Undefined: NetR86_1 NetU3_W9 NetU3_W10
component class Sheet1: C186 C187 U6
component class [08]-DDR2_FPGA_INTERFACE: C137 C138 C139 C140 C141 C142 C154 C156 C158 C159 C160 C161 C162 C163 C164 C165
component class FPGA_BANK_7_8: C105 C106 C149 C183 C184 C185
component class [07]-FPGA_BANK_5: * C136 C144 C145 C157 C173 C175 C176 C177 C179 C180 C182 L12 R26 R27 R28 R29 R30 R31 U3
component class DDR2_POWER_SUPPLY: C77 C78 C95 C96 C97 C98 C99 C100 C107 C108 C109 C110 C111 C122 C147 C148 L3 R33 R86 U9 U10 U11
component class [11]-SDCARD_TESTPOINTS_EXT_SPI_INTERFACE: C150 C151 CN2 F2 J1 J2 L10 TP0 TP1 TP2 TP3 TP4 U8
component class [6]-USB_C_MUX_INTERFACE: C81 C82 C83 C84 C85 C86 C87 C88 CN1 D6 D7 D8 D9 D10 F1 L4 R62 R63 R64 R65 R66 R67 R68 R69 U4
component class [06]-DDR2_INTERFACE: C119 C120 C121 C125 C126 C127 C128 C133 C135 U5
component class [05]-FT601_FPGA_INTERFACE: C79 C80 C89 C90 C91 C92 C93 C94 C146 C170 C172
component class [05]-FT601_FPGA_INTERFACE_0: C41 C42 C43 C44 C45 C46 C47 C48 C49 C50 C51 C52 C53 C54 C55 C56 C57 C58 C59 C60 C61 C62 C73 C74 D1 D2 L8 R11 R12 R13 R14 R15 R16 R17 R18 R19 R20 R21 R22 R23 R24 R25 R34 R35 R36 R37 R38 R39 R40 R41 R42 R43 R44 R45 R46 R47 R48 R49 R50 R51 R52 R53 R54 R55 R56 R57 R58 R59 R60 R61 R70 R71 R72 R73 R74 R75 R76 R77 U7 VR1 X3
component class [04]-PYTHON_FPGA_MAX_25_INTERFACE: C37 C38 C39 C40 R5 R6 R7 R8 R9 R10 X2
component class [03]-PYTHON500_INTERFACE: C1 C2 C3 C4 C5 C6 C7 C8 C9 C10 C11 C12 C13 C14 C15 C16 C17 C18 C19 C20 C21 C22 C23 C24 C25 C26 C27 C28 C29 C30 C31 C32 C33 C34 C35 C36 L1 L2 R1 R2 R3 R4 U1 U2 X1
component class V2_FPGA_POWER_SUPPLY: C63 C64 C65 C66 C67 C68 C69 C70 C71 C72 C75 C76 C112 C113 C114 C115 C116 C117 C118 C143 FB1 FB2 FB3 L5 L6 L7 L9 L11 R78 R79 R80 R81 R82 R83 R84 R85 U12 U13 U14
differential pair UDQS: +UDQS_P -UDQS_N
differential pair TX2: +TX2_P -TX2_N
differential pair TX1: +TX1_P -TX1_N
differential pair TOD: +TOD_P -TOD_N
differential pair RX2: +RX2_P -RX2_N
differential pair RX1: +RX1_P -RX1_N
differential pair RID: +RID_P -RID_N
differential pair LDQS: +LDQS_P -LDQS_N
differential pair D: +D_P -D_N
differential pair CLKIN: +CLKIN_P -CLKIN_N
differential pair CK: +CK_P -CK_N
differential pair CLK: +clk_p -clk_n
differential pair DOUT0: +DOUT0_P -DOUT0_N
differential pair DOUT1: +DOUT1_P -DOUT1_N
differential pair DOUT2: +DOUT2_P -DOUT2_N
differential pair DOUT3: +DOUT3_P -DOUT3_N
differential pair SYNC: +SYNC_P -SYNC_N

## Components (designator, comment, footprint, x,y, rotation, side; value= is the part's Value field where it differs from the comment)
C1 "1u" *0603 3019.69,1169.29 r90 bottom
C2 "1u" *0603 3263.78,1216.54 r90 top
C3 "4.7u" *CAPC2013X140N 2948.82,1291.34 r270 bottom
C4 "4.7u" *CAPC2013X140N 2940.94,1169.29 r270 bottom
C5 "4.7u" *CAPC2013X140N 2897.64,606.3 r180 top
C6 "100n" *CAPC1608X90N 2679.13,354.33 r0 top
C7 "1u" *0603 3334.65,1118.11 r90 bottom
C8 "4.7u" *CAPC2013X140N 3263.78,925.2 r90 top
C9 "100u" CAPC3529X21N 4094.49,1200.79 r270 top
C11 "100n" *CAPC1608X90N 476.38,173.23 r270 top
C12 "4.7u" *CAPC2013X140N 2661.42,555.12 r0 top
C13 "100n" *CAPC1608X90N 2661.42,618.11 r0 top
C14 "1u" *0603 3448.82,1019.68 r90 top
C15 "4.7u" *CAPC2013X140N 3334.65,925.2 r90 top
C16 "10u" CAPCP3216X18N 2334.65,389.76 r0 top
C18 "100n" *CAPC1608X90N 826.77,147.64 r270 top
C19 "100u" CAPC3529X21N 4327.24,1216.34 r270 top
C20 "4.7u" *CAPC2013X140N 2562.49,1610.24 r180 top
C21 "100n" *CAPC1608X90N 2566.93,1543.31 r180 top
C22 "1u" *0603 2362.2,555.12 r180 top
C23 "100n" *CAPC1608X90N 598.43,1153.54 r90 top
C24 "10u" CAPC3528X21N 433.07,1303.15 r270 top
C25 "4.7u" *CAPC2013X140N 3255.91,484.25 r180 top
C26 "1u" *0603 2362.2,480.32 r180 top
C27 "100n" *CAPC1608X90N 2368.11,606.3 r0 top
C28 "4.7u" *CAPC2013X140N 2917.32,1047.75 r90 bottom
C29 "1u" *0603 3027.56,1039.37 r90 bottom
C30 "4.7u" *CAPC2013X140N 2546.74,555.12 r0 top
C31 "1u" *0603 2545.28,618.11 r0 top
C32 "4.7u" *CAPC2013X140N 2779.53,1606.3 r180 top
C33 "1u" *0603 2781.5,1547.24 r180 top
C34 "100u" CAPC3529X21N 4675,1030 r270 top
C35 "100u" CAPC3529X21N 4695.79,1370 r0 top
C36 "100n" *CAPC1608X90N 2864.17,358.27 r180 top
C37 "4.7u" *CAPC2013X140N 1025,1495 r270 top
C38 "1u" *0603 1090,1493.46 r270 top
C39 "4.7u" *CAPC2013X140N 800,1490 r270 top
C40 "1u" *0603 715,1485 r270 top
C41 "10u" CAPC3528X21N 6290,2060 r90 top
C42 "10u" CAPC3528X21N 5840,2035 r90 top
C43 "10u" CAPC3528X21N 6080,2040 r90 top
C44 "470n" *CAPC1005X60N 5370,2060 r90 top
C45 "100n" *CAPC2012X135N 5625,2020 r90 top
C46 "470n" *CAPC1005X60N 4910,2060 r90 top
C47 "100n" *CAPC2012X135N 5165,2020 r90 top
C49 "100n" *CAPC1005X60N 629.92,433.07 r180 bottom
C54 "100n" *CAPC1005X60N 664.67,484.25 r180 top
C59 "4.7u" *CAPC2013X140N 6067.5,3905 r90 top
C62 "6.8n" *0603 5827.5,3900 r90 top
C63 "22u" *CAPC2013X140N 9955.41,465.51 r90 top
C64 "100n" *CAPC1005X60N 9707.38,489.13 r90 top
C66 "100n" *CAPC1005X60N 9479.03,489.13 r90 top
C67 "22u" *CAPC2013X140N 9034.15,465.51 r90 top
C68 "0.022u" *CAPC1005X60N 8557.77,489.13 r90 top
C69 "22u" *CAPC2013X140N 6982.97,465.51 r90 top
C70 "22u" *CAPC2013X140N 7211.32,465.51 r90 top
C71 "22u" *CAPC2013X140N 6101.09,489.13 r0 top
C72 "22u" *CAPC2013X140N 6290.06,465.51 r90 top
C75 "2700p" *CAPC1005X60N 5829.43,489.13 r90 top
C76 "0.022u" *CAPC1005X60N 4912.11,489.13 r90 top
C77 "10u" CAPC3225X28N 7219.19,296.22 r90 top
C78 "10u" CAPC3225X28N 7045.97,304.09 r0 top
C80 "100n" *0603 5758.57,150.55 r90 top
C81 "10u" CAPC3528X21N 7520,4595 r0 top
C84 "100n" *CAPC1005X60N 488.19,464.57 r0 bottom
C85 "100n" *CAPC1005X60N 479,685 r0 bottom
C86 "100n" *CAPC1005X60N 480,535 r0 bottom
C87 "100n" *CAPC1005X60N 479,585 r0 bottom
C89 "1u" *0603 5820,3185 r90 top
C90 "4.7u" *CAPC2013X140N 6060,3190 r90 top
C91 "1u" *0603 5380,3185 r90 top
C92 "4.7u" *CAPC2013X140N 5600,3190 r90 top
C93 "1u" *0603 4920,3185 r90 top
C94 "4.7u" *CAPC2013X140N 5160,3190 r90 top
C95 "10u" *CAPC2013X140N 3251.97,728.35 r90 top
C96 "100n" *0603 6746.75,288.34 r90 top
C97 "10u" *CAPC2013X140N 3330.71,728.35 r90 top
C98 "33n" *0603 3334.65,606.3 r270 top
C99 "100u" CAPC3225X28N 3295.28,344.49 r270 top
C100 "100u" CAPC3225X28N 3161.42,344.49 r270 top
C105 "4.7u" *0603 4919.99,24.56 r90 top
C106 "100n" *0603 5207.39,32.44 r90 top
C107 "100u" CAPC3225X28N 3295.28,155.51 r90 top
C108 "100u" CAPC3225X28N 3429.13,155.51 r90 top
C109 "100u" CAPC3225X28N 3161.42,155.51 r90 top
C110 "100u" CAPC3225X28N 3027.56,344.49 r270 top
C111 "4.7u" *0603 4919.99,1764.72 r90 top
C112 "22u" *CAPC2013X140N 6479.04,3536.37 r90 top
C113 "100n" *CAPC1005X60N 6731.01,3559.99 r90 top
C114 "22u" *CAPC2013X140N 5738.88,3536.37 r90 top
C115 "100n" *CAPC1005X60N 5990.85,3559.99 r90 top
C116 "22u" *CAPC2013X140N 4927.86,3536.37 r90 top
C117 "100n" *CAPC1005X60N 5179.83,3559.99 r90 top
C118 "10u" CAPC3529X21N 5553.84,3516.68 r0 top
C119 "100n" *CAPC1005X60N 1543.31,559.06 r0 top
C120 "100n" *CAPC1005X60N 1610.24,559.06 r180 top
C121 "100n" *CAPC1005X60N 1788.09,574.8 r0 top
C122 "100u" CAPC3225X28N 3027.56,155.51 r90 top
C125 "100n" *CAPC1005X60N 1740.16,244.09 r180 top
C126 "100n" *CAPC1005X60N 1598.43,374.02 r0 top
C127 "100n" *CAPC1005X60N 1881.89,244.09 r0 top
C128 "100n" *CAPC1005X60N 1677.17,559.06 r180 top
C133 "100n" *CAPC1005X60N 1933.07,598.43 r180 top
C135 "0.22u" *0603 1755.91,401.57 r0 top
C136 "0.22" *0603 7660.14,1146.61 r90 top
C138 "100u" CAPC3225X28N 4986.91,729.29 r0 top
C140 "100u" CAPC3225X28N 5266.44,729.29 r0 top
C142 "100u" CAPC3225X28N 5545.97,729.29 r0 top
C144 "4.7" *CAPC2013X140N 7388.49,1150.55 r90 top
C145 "0.22u" *0603 7101.08,1146.61 r90 top
C146 "47u" CAPC3529X21N 5573.53,138.74 r0 top
C147 "150u" CAPC3529X21N 3582.68,350.39 r90 top
C148 "150u" CAPC3529X21N 3437.01,348.43 r90 top
C149 "100u" CAPC3529X21N 5853.06,2059.99 r0 top
C150 "10u" CAPC3528X21N 5511.81,7877.95 r0 top
C156 "100u" CAPC3529X21N 5573.53,1441.88 r0 top
C157 "100u" CAPC3225X28N 4986.91,434.01 r0 top
C159 "100n" *0603 6581.4,1453.69 r90 top
C160 "47u" CAPC3529X21N 6396.36,1441.88 r0 top
C161 "0.22u" *0603 6038.09,1453.69 r90 top
C162 "100n" *0603 5758.57,1453.69 r90 top
C164 "100n" *0603 5199.51,1453.69 r90 top
C165 "100u" CAPC3529X21N 5014.47,1441.88 r0 top
C170 "100n" *0603 5199.51,150.55 r90 top
C172 "100u" CAPC3529X21N 5014.47,138.74 r0 top
C173 "100n" *0603 6817.62,1146.61 r90 top
C175 "100u" CAPC3529X21N 6632.58,1130.86 r0 top
C176 "1u" *0603 6258.57,1146.61 r90 top
C177 "100n" *0603 5758.57,1146.61 r90 top
C179 "100u" CAPC3529X21N 5573.53,1130.86 r0 top
C180 "100n" *0603 5199.51,1146.61 r90 top
C182 "100u" CAPC3529X21N 5014.47,1130.86 r0 top
C183 "47u" CAPC3529X21N 5573.53,2059.99 r0 top
C184 "1u" *0603 4919.99,2075.74 r90 top
C185 "4.7u" *CAPC2013X140N 5207.39,2079.68 r90 top
C186 "1u" *0603 4919.99,3221.41 r90 top
C187 "4.7u" *CAPC2013X140N 5207.39,3229.28 r90 top
CN1 "USB_MICRO-C" "PCBComponent_1 - duplicate1" 275,676.18 r270 top locked
CN2 "SPI_connector" TE_7-215079-8_0 185,1440 r90 top locked
D1 "Kingbright Green LED, 70 mcd 120 ° 0805" LED1913X12NGREEN 696.85,980.32 r0 top
D2 "Kingbright Orange LED, 200 mcd 120 ° 0805" LED1913X12NYEL/ORANGE 4975.1,674.17 r0 top
D8 "TPD4E02B04" TI_TPD4E05U06DQAR 535.43,378.54 r90 bottom
D9 "TPD4E02B04" TI_TPD4E05U06DQAR 4943.61,130.86 r0 top
D10 "TPD4E02B04" TI_TPD4E05U06DQAR 5112.9,130.86 r0 top
FB1 "10/1740m" *CAPC1005X55N 10171.94,485.19 r90 top
FB2 "10/1740m" *CAPC1005X55N 7892.42,485.19 r90 top
FB3 "10/1740m" *CAPC1005X55N 7660.14,485.19 r90 top
J1 "1761681-3" Harwin_Inc._M50-3500542_0 1430,1705 r0 top locked
J2 "1761681-3" Harwin_Inc._M50-3500542_0 1755,1705 r0 top locked
L1 "10u" *INDC1608X95N 259.84,161.42 r0 top
L2 "10u" *INDC1608X95N 661.42,110.24 r0 top
L3 "1u" *INDC1608X95N 3712.6,299.21 r180 top
L4 "33R/100M" *FB_BLM18PG121SN1D 7725,4635 r0 top
L6 "0.470u" INDC3234X16N 7498.72,441.89 r0 top
L7 "0.470u" INDC3234X16N 6805.81,441.89 r0 top
L8 "10u" *INDC1608X95N 2235.63,559.06 r180 top
L9 "10u" *INDC1608X95N 7045.97,3559.99 r0 top
L10 "33R/100M" *FB_BLM18PG121SN1D 6125,7790 r90 top
L11 "10u" *INDC1608X95N 6305.81,3559.99 r0 top
L12 "10u" *INDC1608X95N 6045.97,1146.61 r90 top
R1 "47K" *0603 2667.32,425.2 r0 top
R2 "100" *R0402 2750.22,496.06 r270 top
R3 "100" *0603 2818.9,608.48 r180 top
R4 "100" *0603 2783.46,608.48 r180 top
R5 "100" *R0402 2318.9,1287.4 r0 top
R6 "100" *R0402 2318.9,1204.72 r0 top
R7 "100" *R0402 2318.9,1124.23 r180 top
R8 "100" *R0402 2318.9,1045.49 r180 top
R9 "100" *R0402 2318.9,964.57 r180 top
R10 "100" *R0402 2318.9,881.89 r180 top
R11 "33" *R0402 12547.5,3900 r90 top
R12 "33" *R0402 1198.17,299.21 r270 bottom
R13 "33" *R0402 1198.17,334.65 r270 bottom
R14 "33" *R0402 1198.17,370.08 r270 bottom
R15 "33" *R0402 1198.6,405.51 r270 bottom
R16 "10K" *0603 9777.5,3900 r90 top
R17 "10K" *0603 9997.5,3900 r90 top
R18 "33" *R0402 1198.6,440.95 r270 bottom
R19 "10K" *0603 7207.5,3900 r90 top
R20 "10K" *0603 7427.5,3900 r90 top
R21 "10K" *0603 7657.5,3900 r90 top
R22 "10K" *0603 7867.5,3900 r90 top
R23 "4K7" *RESC1608X50N 6982.5,3895 r90 top
R24 "1K6" *0603 6287.5,3900 r90 top
R25 "33" *R0402 1200.79,192.91 r270 bottom
R26 "50" *R0402 9230,5795 r0 top
R27 "50" *R0402 8890,5795 r0 top
R28 "10K" *0603 6160,5790 r0 top
R29 "10K" *0603 6330,5790 r0 top
R30 "10K" *0603 6500,5790 r0 top
R31 "10K" *0603 6670,5790 r0 top
R33 "5.11K" *RESC1608X60N 4925,9645 r0 top
R34 "33" *R0402 1198.6,476.38 r270 bottom
R35 "33" *R0402 1198.6,511.81 r270 bottom
R36 "33" *R0402 1198.6,547.24 r270 bottom
R37 "33" *R0402 1198.6,582.68 r270 bottom
R38 "33" *R0402 1198.6,618.11 r270 bottom
R39 "33" *R0402 1198.6,653.54 r270 bottom
R40 "33" *R0402 1198.6,688.98 r270 bottom
R41 "33" *R0402 1198.6,724.41 r270 bottom
R42 "33" *R0402 1198.6,759.84 r270 bottom
R43 "33" *R0402 1133.86,863.96 r0 bottom
R44 "33" *R0402 1098.43,862.2 r0 bottom
R45 "33" *R0402 1062.99,862.2 r0 bottom
R46 "33" *R0402 1198.6,263.78 r90 bottom
R47 "33" *R0402 1027.56,862.2 r0 bottom
R48 "33" *R0402 1199.19,228.98 r90 bottom
R49 "33" *R0402 992.13,862.2 r0 bottom
R50 "33" *R0402 1055.12,283.46 r0 bottom
R51 "33" *R0402 956.69,862.2 r0 bottom
R52 "33" *R0402 984.25,283.46 r0 bottom
R53 "33" *R0402 921.26,862.2 r0 bottom
R54 "33" *R0402 1019.68,285.22 r0 bottom
R55 "33" *R0402 885.83,862.2 r0 bottom
R56 "33" *R0402 948.82,285.22 r0 bottom
R57 "33" *R0402 850.39,862.2 r0 bottom
R58 "33" *R0402 913.39,283.46 r0 bottom
R59 "33" *R0402 807.09,281.28 r0 bottom
R60 "33" *R0402 842.52,283.46 r0 bottom
R61 "33" *R0402 814.96,863.96 r0 bottom
R62 "4.7K" *RESC1608X50N 6970,4600 r90 top
R63 "4.7K" *RESC1608X50N 7200,4600 r90 top
R67 "10K" *0603 6500,4605 r90 top
R68 "10K" *0603 6730,4605 r90 top
R70 "33" *R0402 877.95,283.46 r0 bottom
R71 "33" *R0402 779.53,863.96 r0 bottom
R72 "33" *R0402 744.09,863.96 r0 bottom
R73 "33" *R0402 708.66,862.2 r0 bottom
R74 "33" *R0402 673.23,863.96 r0 bottom
R75 "33" *R0402 637.8,864.39 r0 bottom
R76 "33" *R0402 602.36,866.14 r0 bottom
R77 "33" *R0402 566.93,868.33 r0 bottom
R78 "42K2" *R0402 9266.43,504.88 r90 top
R79 "8K2" *R0402 8809.74,504.88 r90 top
R80 "20K" *R0402 8349.11,504.88 r90 top
R81 "100K" *R0402 8120.77,485.19 r0 top
R82 "20K" *R0402 6522.34,504.88 r90 top
R83 "100K" *R0402 5392.43,504.88 r90 top
R84 "100K" *R0402 5620.77,504.88 r90 top
R85 "20K" *R0402 5160.14,504.88 r90 top
R86 "100k" *RESC1608X60N 4916.05,296.22 r90 top
TP1 "TEST-7CN" PCBComponent_1 597.95,1104.33 r0 top
TP2 "TEST-7CN" PCBComponent_1 1037.4,999.53 r90 top
TP3 "TEST-7CN" PCBComponent_1 1041.34,897.17 r90 top
TP4 "TEST-7CN" PCBComponent_1 1155.51,975.91 r90 top
U1 "NOIP1SN0500A" LCC101P1430X1430X228-48N 2800.71,1099.96 r0 top locked
U2 "TPS73218" *SOT95P280X145-5N 539.37,980.32 r0 top
U3 "10M25" *BGA484C100P22X22_2300X2300X200N 1724.41,1099.96 r270 top locked
U4 "HD3SS3220IRNHT" QFN40P450X250X80-31N120X320 605,615 r0 bottom
U5 "MT47H64M16HR-25:H" BGA84CP80_15X9_1250X900X120B45N 1724.41,401.57 r270 bottom locked
U6 "10M25" *BGA484C100P22X22_2300X2300X200N 1972.44,3263.78 r0 top
U7 "FT601Q-B-T" QFN40P900X900X100-77N 915,540 r90 bottom
U9 "IRF7821PBF" SOIC127P600X175-8N 3897.64,421.26 r90 top
U10 "TPS51116PWP" SOP65P640X120-21N 4161.42,566.93 r270 top
U11 "IRF7832PbF" SOIC127P600X172-8N 3900.2,715.11 r90 top
VR1 "REG1117" *SOT223 3669.29,1322.83 r0 top
X1 "72MHZ" OSCSC320X250X100N 2868.11,472.44 r180 top
X2 "40MHZ" OSCSC320X250X100N 905,1490 r180 top
X3 "30MHZ" OSC_DSC6083CI2A-032K768 675,240 r180 bottom

## Footprints (in the part's own frame and the unit in brackets; to place one, negate y for a bottom-side part, rotate by r counter-clockwise, add the part's x,y. Pads: shape width x height; smd on the part's side, far side on the other; paste and mask are expansions set on the pad)
*0603 [mm]
  rect 1.1x1 smd: 1(-0.85,0) 2(0.85,0)
  body extent -0.84,-0.47 0.83,0.48, height 0.76
*BGA484C100P22X22_2300X2300X200N [mm]
  round 0.5 smd: A1(-10.5,10.5) A2(-9.5,10.5) A3(-8.5,10.5) A4(-7.5,10.5) A5(-6.5,10.5) A6(-5.5,10.5) A7(-4.5,10.5) A8(-3.5,10.5) A9(-2.5,10.5) A10(-1.5,10.5) A11(-0.5,10.5) A12(0.5,10.5) A13(1.5,10.5) A14(2.5,10.5) A15(3.5,10.5) A16(4.5,10.5) A17(5.5,10.5) A18(6.5,10.5) A19(7.5,10.5) A20(8.5,10.5) A21(9.5,10.5) A22(10.5,10.5) AA1(-10.5,-9.5) AA2(-9.5,-9.5) AA3(-8.5,-9.5) AA4(-7.5,-9.5) AA5(-6.5,-9.5) AA6(-5.5,-9.5) AA7(-4.5,-9.5) AA8(-3.5,-9.5) AA9(-2.5,-9.5) AA10(-1.5,-9.5) AA11(-0.5,-9.5) AA12(0.5,-9.5) AA13(1.5,-9.5) AA14(2.5,-9.5) AA15(3.5,-9.5) AA16(4.5,-9.5) AA17(5.5,-9.5) AA18(6.5,-9.5) AA19(7.5,-9.5) AA20(8.5,-9.5) AA21(9.5,-9.5) AA22(10.5,-9.5) AB1(-10.5,-10.5) AB2(-9.5,-10.5) AB3(-8.5,-10.5) AB4(-7.5,-10.5) AB5(-6.5,-10.5) AB6(-5.5,-10.5) AB7(-4.5,-10.5) AB8(-3.5,-10.5) AB9(-2.5,-10.5) AB10(-1.5,-10.5) AB11(-0.5,-10.5) AB12(0.5,-10.5) AB13(1.5,-10.5) AB14(2.5,-10.5) AB15(3.5,-10.5) AB16(4.5,-10.5) AB17(5.5,-10.5) AB18(6.5,-10.5) AB19(7.5,-10.5) AB20(8.5,-10.5) AB21(9.5,-10.5) AB22(10.5,-10.5) B1(-10.5,9.5) B2(-9.5,9.5) B3(-8.5,9.5) B4(-7.5,9.5) B5(-6.5,9.5) B6(-5.5,9.5) B7(-4.5,9.5) B8(-3.5,9.5) B9(-2.5,9.5) B10(-1.5,9.5) B11(-0.5,9.5) B12(0.5,9.5) B13(1.5,9.5) B14(2.5,9.5) B15(3.5,9.5) B16(4.5,9.5) B17(5.5,9.5) B18(6.5,9.5) B19(7.5,9.5) B20(8.5,9.5) B21(9.5,9.5) B22(10.5,9.5) C1(-10.5,8.5) C2(-9.5,8.5) C3(-8.5,8.5) C4(-7.5,8.5) C5(-6.5,8.5) C6(-5.5,8.5) C7(-4.5,8.5) C8(-3.5,8.5) C9(-2.5,8.5) C10(-1.5,8.5) C11(-0.5,8.5) C12(0.5,8.5) C13(1.5,8.5) C14(2.5,8.5) C15(3.5,8.5) C16(4.5,8.5) C17(5.5,8.5) C18(6.5,8.5) C19(7.5,8.5) C20(8.5,8.5) C21(9.5,8.5) C22(10.5,8.5) D1(-10.5,7.5) D2(-9.5,7.5) D3(-8.5,7.5) D4(-7.5,7.5) D5(-6.5,7.5) D6(-5.5,7.5) D7(-4.5,7.5) D8(-3.5,7.5) D9(-2.5,7.5) D10(-1.5,7.5) D11(-0.5,7.5) D12(0.5,7.5) D13(1.5,7.5) D14(2.5,7.5) D15(3.5,7.5) D16(4.5,7.5) D17(5.5,7.5) D18(6.5,7.5) D19(7.5,7.5) D20(8.5,7.5) D21(9.5,7.5) D22(10.5,7.5) E1(-10.5,6.5) E2(-9.5,6.5) E3(-8.5,6.5) E4(-7.5,6.5) E5(-6.5,6.5) E6(-5.5,6.5) E7(-4.5,6.5) E8(-3.5,6.5) E9(-2.5,6.5) E10(-1.5,6.5) E11(-0.5,6.5) E12(0.5,6.5) E13(1.5,6.5) E14(2.5,6.5) E15(3.5,6.5) E16(4.5,6.5) E17(5.5,6.5) E18(6.5,6.5) E19(7.5,6.5) E20(8.5,6.5) E21(9.5,6.5) E22(10.5,6.5) F1(-10.5,5.5) F2(-9.5,5.5) F3(-8.5,5.5) F4(-7.5,5.5) F5(-6.5,5.5) F6(-5.5,5.5) F7(-4.5,5.5) F8(-3.5,5.5) F9(-2.5,5.5) F10(-1.5,5.5) F11(-0.5,5.5) F12(0.5,5.5) F13(1.5,5.5) F14(2.5,5.5) F15(3.5,5.5) F16(4.5,5.5) F17(5.5,5.5) F18(6.5,5.5) F19(7.5,5.5) F20(8.5,5.5) F21(9.5,5.5) F22(10.5,5.5) G1(-10.5,4.5) G2(-9.5,4.5) G3(-8.5,4.5) G4(-7.5,4.5) G5(-6.5,4.5) G6(-5.5,4.5) G7(-4.5,4.5) G8(-3.5,4.5) G9(-2.5,4.5) G10(-1.5,4.5) G11(-0.5,4.5) G12(0.5,4.5) G13(1.5,4.5) G14(2.5,4.5) G15(3.5,4.5) G16(4.5,4.5) G17(5.5,4.5) G18(6.5,4.5) G19(7.5,4.5) G20(8.5,4.5) G21(9.5,4.5) G22(10.5,4.5) H1(-10.5,3.5) H2(-9.5,3.5) H3(-8.5,3.5) H4(-7.5,3.5) H5(-6.5,3.5) H6(-5.5,3.5) H7(-4.5,3.5) H8(-3.5,3.5) H9(-2.5,3.5) H10(-1.5,3.5) H11(-0.5,3.5) H12(0.5,3.5) H13(1.5,3.5) H14(2.5,3.5) H15(3.5,3.5) H16(4.5,3.5) H17(5.5,3.5) H18(6.5,3.5) H19(7.5,3.5) H20(8.5,3.5) H21(9.5,3.5) H22(10.5,3.5) J1(-10.5,2.5) J2(-9.5,2.5) J3(-8.5,2.5) J4(-7.5,2.5) J5(-6.5,2.5) J6(-5.5,2.5) J7(-4.5,2.5) J8(-3.5,2.5) J9(-2.5,2.5) J10(-1.5,2.5) J11(-0.5,2.5) J12(0.5,2.5) J13(1.5,2.5) J14(2.5,2.5) J15(3.5,2.5) J16(4.5,2.5) J17(5.5,2.5) J18(6.5,2.5) J19(7.5,2.5) J20(8.5,2.5) J21(9.5,2.5) J22(10.5,2.5) K1(-10.5,1.5) K2(-9.5,1.5) K3(-8.5,1.5) K4(-7.5,1.5) K5(-6.5,1.5) K6(-5.5,1.5) K7(-4.5,1.5) K8(-3.5,1.5) K9(-2.5,1.5) K10(-1.5,1.5) K11(-0.5,1.5) K12(0.5,1.5) K13(1.5,1.5) K14(2.5,1.5) K15(3.5,1.5) K16(4.5,1.5) K17(5.5,1.5) K18(6.5,1.5) K19(7.5,1.5) K20(8.5,1.5) K21(9.5,1.5) K22(10.5,1.5) L1(-10.5,0.5) L2(-9.5,0.5) L3(-8.5,0.5) L4(-7.5,0.5) L5(-6.5,0.5) L6(-5.5,0.5) L7(-4.5,0.5) L8(-3.5,0.5) L9(-2.5,0.5) L10(-1.5,0.5) L11(-0.5,0.5) L12(0.5,0.5) L13(1.5,0.5) L14(2.5,0.5) L15(3.5,0.5) L16(4.5,0.5) L17(5.5,0.5) L18(6.5,0.5) L19(7.5,0.5) L20(8.5,0.5) L21(9.5,0.5) L22(10.5,0.5) M1(-10.5,-0.5) M2(-9.5,-0.5) M3(-8.5,-0.5) M4(-7.5,-0.5) M5(-6.5,-0.5) M6(-5.5,-0.5) M7(-4.5,-0.5) M8(-3.5,-0.5) M9(-2.5,-0.5) M10(-1.5,-0.5) M11(-0.5,-0.5) M12(0.5,-0.5) M13(1.5,-0.5) M14(2.5,-0.5) M15(3.5,-0.5) M16(4.5,-0.5) M17(5.5,-0.5) M18(6.5,-0.5) M19(7.5,-0.5) M20(8.5,-0.5) M21(9.5,-0.5) M22(10.5,-0.5) N1(-10.5,-1.5) N2(-9.5,-1.5) N3(-8.5,-1.5) N4(-7.5,-1.5) N5(-6.5,-1.5) N6(-5.5,-1.5) N7(-4.5,-1.5) N8(-3.5,-1.5) N9(-2.5,-1.5) N10(-1.5,-1.5) N11(-0.5,-1.5) N12(0.5,-1.5) N13(1.5,-1.5) N14(2.5,-1.5) N15(3.5,-1.5) N16(4.5,-1.5) N17(5.5,-1.5) N18(6.5,-1.5) N19(7.5,-1.5) N20(8.5,-1.5) N21(9.5,-1.5) N22(10.5,-1.5) P1(-10.5,-2.5) P2(-9.5,-2.5) P3(-8.5,-2.5) P4(-7.5,-2.5) P5(-6.5,-2.5) P6(-5.5,-2.5) P7(-4.5,-2.5) P8(-3.5,-2.5) P9(-2.5,-2.5) P10(-1.5,-2.5) P11(-0.5,-2.5) P12(0.5,-2.5) P13(1.5,-2.5) P14(2.5,-2.5) P15(3.5,-2.5) P16(4.5,-2.5) P17(5.5,-2.5) P18(6.5,-2.5) P19(7.5,-2.5) P20(8.5,-2.5) P21(9.5,-2.5) P22(10.5,-2.5) R1(-10.5,-3.5) R2(-9.5,-3.5) R3(-8.5,-3.5) R4(-7.5,-3.5) R5(-6.5,-3.5) R6(-5.5,-3.5) R7(-4.5,-3.5) R8(-3.5,-3.5) R9(-2.5,-3.5) R10(-1.5,-3.5) R11(-0.5,-3.5) R12(0.5,-3.5) R13(1.5,-3.5) R14(2.5,-3.5) R15(3.5,-3.5) R16(4.5,-3.5) R17(5.5,-3.5) R18(6.5,-3.5) R19(7.5,-3.5) R20(8.5,-3.5) R21(9.5,-3.5) R22(10.5,-3.5) T1(-10.5,-4.5) T2(-9.5,-4.5) T3(-8.5,-4.5) T4(-7.5,-4.5) T5(-6.5,-4.5) T6(-5.5,-4.5) T7(-4.5,-4.5) T8(-3.5,-4.5) T9(-2.5,-4.5) T10(-1.5,-4.5) T11(-0.5,-4.5) T12(0.5,-4.5) T13(1.5,-4.5) T14(2.5,-4.5) T15(3.5,-4.5) T16(4.5,-4.5) T17(5.5,-4.5) T18(6.5,-4.5) T19(7.5,-4.5) T20(8.5,-4.5) T21(9.5,-4.5) T22(10.5,-4.5) U1(-10.5,-5.5) U2(-9.5,-5.5) U3(-8.5,-5.5) U4(-7.5,-5.5) U5(-6.5,-5.5) U6(-5.5,-5.5) U7(-4.5,-5.5) U8(-3.5,-5.5) U9(-2.5,-5.5) U10(-1.5,-5.5) U11(-0.5,-5.5) U12(0.5,-5.5) U13(1.5,-5.5) U14(2.5,-5.5) U15(3.5,-5.5) U16(4.5,-5.5) U17(5.5,-5.5) U18(6.5,-5.5) U19(7.5,-5.5) U20(8.5,-5.5) U21(9.5,-5.5) U22(10.5,-5.5) V1(-10.5,-6.5) V2(-9.5,-6.5) V3(-8.5,-6.5) V4(-7.5,-6.5) V5(-6.5,-6.5) V6(-5.5,-6.5) V7(-4.5,-6.5) V8(-3.5,-6.5) V9(-2.5,-6.5) V10(-1.5,-6.5) V11(-0.5,-6.5) V12(0.5,-6.5) V13(1.5,-6.5) V14(2.5,-6.5) V15(3.5,-6.5) V16(4.5,-6.5) V17(5.5,-6.5) V18(6.5,-6.5) V19(7.5,-6.5) V20(8.5,-6.5) V21(9.5,-6.5) V22(10.5,-6.5) W1(-10.5,-7.5) W2(-9.5,-7.5) W3(-8.5,-7.5) W4(-7.5,-7.5) W5(-6.5,-7.5) W6(-5.5,-7.5) W7(-4.5,-7.5) W8(-3.5,-7.5) W9(-2.5,-7.5) W10(-1.5,-7.5) W11(-0.5,-7.5) W12(0.5,-7.5) W13(1.5,-7.5) W14(2.5,-7.5) W15(3.5,-7.5) W16(4.5,-7.5) W17(5.5,-7.5) W18(6.5,-7.5) W19(7.5,-7.5) W20(8.5,-7.5) W21(9.5,-7.5) W22(10.5,-7.5) Y1(-10.5,-8.5) Y2(-9.5,-8.5) Y3(-8.5,-8.5) Y4(-7.5,-8.5) Y5(-6.5,-8.5) Y6(-5.5,-8.5) Y7(-4.5,-8.5) Y8(-3.5,-8.5) Y9(-2.5,-8.5) Y10(-1.5,-8.5) Y11(-0.5,-8.5) Y12(0.5,-8.5) Y13(1.5,-8.5) Y14(2.5,-8.5) Y15(3.5,-8.5) Y16(4.5,-8.5) Y17(5.5,-8.5) Y18(6.5,-8.5) Y19(7.5,-8.5) Y20(8.5,-8.5) Y21(9.5,-8.5) Y22(10.5,-8.5)
  silkscreen extent -12.26,-11.5 11.5,11.5, body extent -11.68,-11.68 11.56,11.56, height 2
*CAPC1005X55N [mm]
  rect 0.6x0.62 smd: 1(-0.46,0) 2(0.46,0)
*CAPC1005X60N [mil]
  rect 18x24 smd: 1(-19,0) 2(19,0)
  body extent -22,-12 22,12, height 17
*CAPC1608X90N [mm]
  rect 0.9x0.95 smd: 1(-0.75,0) 2(0.75,0)
  body extent -1.3,-0.58 1.3,0.58, height 1
*CAPC2012X135N [mm]
  rect 1.3x1.5 smd: 1(-0.95,0) 2(0.95,0)
  silkscreen extent -0.15,-0.65 0.15,0.65, body extent -1.7,-0.85 1.7,0.85, height 1
*CAPC2013X140N [mil]
  rect 36x57 smd: 1(-32,0) 2(32,0)
  body extent -43,-29 43,29, height 30
*FB_BLM18PG121SN1D [mm]
  rect 0.85x0.7 smd: 1(-0.825,0) 2(0.825,0)
  silkscreen extent -0.1,-0.4 0.1,0.4, body extent -0.8,-0.4 0.8,0.4, height 0.76
*INDC1608X95N [mm]
  rect 0.9x0.97 smd: 1(-0.785,0) 2(0.785,0)
  silkscreen extent -0.8,-0.66 0.8,0.66, body extent -0.88,-0.48 0.88,0.48, height 0.76
*R0402 [mil]
  rect 25x25 smd: 1(0,17.5) 2(0,-17.5)
  silkscreen extent -18,-35 18,35
*RESC1608X50N [mm]
  rect 0.94x1.02 smd: 1(-0.79,0) 2(0.79,0)
  silkscreen extent -0.8,-0.69 0.8,0.69, body extent -1.36,-0.61 1.36,0.61, height 0.76
*RESC1608X60N [mil]
  rect 30x37 smd: 1(-33,0) 2(33,0)
  silkscreen extent -5,-19 5,19, body extent -33,-19 33,19, height 30
*SOT95P280X145-5N [mm]
  rect 1.21x0.59 smd: 1(-1.255,0.95) 2(-1.255,0) 3(-1.255,-0.95) 4(1.255,-0.95) 5(1.255,0.95)
  silkscreen extent -2.47,0.93 -2.33,1.07, body extent -0.94,-1.59 0.94,1.59, height 0.76
*SOT223 [mil]
  rect 59x79 smd: 1(-89,-124) 2(1,-124) 3(91,-124)
  rect 150x79 smd: 4(0,124)
  silkscreen extent -123,-68 123,68, body extent -132,-139 132,149, height 53
BGA84CP80_15X9_1250X900X120B45N [mm]
  round 0.36 smd: A1(-3.2,5.6) A2(-2.4,5.6) A3(-1.6,5.6) A7(1.6,5.6) A8(2.4,5.6) A9(3.2,5.6) B1(-3.2,4.8) B2(-2.4,4.8) B3(-1.6,4.8) B7(1.6,4.8) B8(2.4,4.8) B9(3.2,4.8) C1(-3.2,4) C2(-2.4,4) C3(-1.6,4) C7(1.6,4) C8(2.4,4) C9(3.2,4) D1(-3.2,3.2) D2(-2.4,3.2) D3(-1.6,3.2) D7(1.6,3.2) D8(2.4,3.2) D9(3.2,3.2) E1(-3.2,2.4) E2(-2.4,2.4) E3(-1.6,2.4) E7(1.6,2.4) E8(2.4,2.4) E9(3.2,2.4) F1(-3.2,1.6) F2(-2.4,1.6) F3(-1.6,1.6) F7(1.6,1.6) F8(2.4,1.6) F9(3.2,1.6) G1(-3.2,0.8) G2(-2.4,0.8) G3(-1.6,0.8) G7(1.6,0.8) G8(2.4,0.8) G9(3.2,0.8) H1(-3.2,0) H2(-2.4,0) H3(-1.6,0) H7(1.6,0) H8(2.4,0) H9(3.2,0) J1(-3.2,-0.8) J2(-2.4,-0.8) J3(-1.6,-0.8) J7(1.6,-0.8) J8(2.4,-0.8) J9(3.2,-0.8) K2(-2.4,-1.6) K3(-1.6,-1.6) K7(1.6,-1.6) K8(2.4,-1.6) K9(3.2,-1.6) L1(-3.2,-2.4) L2(-2.4,-2.4) L3(-1.6,-2.4) L7(1.6,-2.4) L8(2.4,-2.4) M2(-2.4,-3.2) M3(-1.6,-3.2) M7(1.6,-3.2) M8(2.4,-3.2) M9(3.2,-3.2) N1(-3.2,-4) N2(-2.4,-4) N3(-1.6,-4) N7(1.6,-4) N8(2.4,-4) P2(-2.4,-4.8) P3(-1.6,-4.8) P7(1.6,-4.8) P8(2.4,-4.8) P9(3.2,-4.8) R1(-3.2,-5.6) R2(-2.4,-5.6) R3(-1.6,-5.6) R7(1.6,-5.6) R8(2.4,-5.6)
  silkscreen extent -4.5,-6.25 4.5,6.25, body extent -4.56,-6.31 4.56,6.31, height 1.2
CAPC3225X28N [mm] "Chip Capacitor, 2-Leads, Body 3.20x2.50mm, IPC Medium Density"
  rect 0.9x2.8 smd: 1(-1.65,0) 2(1.65,0)
  silkscreen extent -0.8,-1.3 0.8,1.3, body extent -1.75,-1.4 1.75,1.4, height 2.8
CAPC3528X21N [mm] "Chip Capacitor, 2-Leads, Body 3.50x2.80mm, IPC Medium Density"
  rect 1.65x3 smd: 1(-1.375,0) 2(1.375,0)
  silkscreen extent -0.15,-1.4 0.15,1.4, body extent -1.85,-1.5 1.85,1.5, height 2.1
CAPC3529X21N [mm] "Chip Capacitor, 2-Leads, Body 3.50x2.85mm, IPC Medium Density"
  rect 1.9x3.05 smd: 1(-1.25,0) 2(1.25,0)
  body extent -1.85,-1.5 1.85,1.5, height 2.1
CAPCP3216X18N [mm] "Chip Capacitor, 2-Leads, Body 3.20x1.60mm, IPC Medium Density"
  rect 1.9x1.8 smd: 1(-1.1,0) 2(1.1,0)
  silkscreen extent -2.31,1.06 -2.21,1.16, body extent -1.7,-0.9 1.7,0.9, height 1.8
Harwin_Inc._M50-3500542_0 [mil]
  rect 44x44 hole 25.59 paste-39370.1 mask+0: 1(-100,-25)
  round 44 hole 25.59 paste-39370.1 mask+0: 2(-100,25) 3(-50,-25) 4(-50,25) 5(0,-25) 6(0,25) 7(50,-25) 8(50,25) 9(100,-25) 10(100,25)
  silkscreen extent -149,-67 125,67, body extent -129,-71 129,71, height 10
INDC3234X16N [mm] "Chip Inductor, 2-Leads, Body 3.25x3.40mm, IPC Medium Density"
  rect 1.48x3.54 smd: 1(-1.315,0) 2(1.315,0)
  silkscreen extent -0.2,-1.67 0.2,1.67, body extent -1.63,-1.7 1.62,1.7, height 1.6
LCC101P1430X1430X228-48N [mm]
  rect 0.6x3.55 smd: 1(-1.018,8.294)
  rect 0.6x2.75 smd: 2(-2.038,8.694) 3(-3.058,8.694) 4(-4.078,8.694) 5(-5.098,8.694) 6(-6.118,8.694) 19(-6.118,-9.456) 20(-5.098,-9.456) 21(-4.078,-9.456) 22(-3.058,-9.456) 23(-2.038,-9.456) 24(-1.018,-9.456) 25(0.002,-9.456) 26(1.022,-9.456) 27(2.042,-9.456) 28(3.062,-9.456) 29(4.082,-9.456) 30(5.102,-9.456) 43(5.102,8.694) 44(4.082,8.694) 45(3.062,8.694) 46(2.042,8.694) 47(1.022,8.694) 48(0.002,8.694)
  rect 2.75x0.6 smd: 7(-9.583,5.229) 8(-9.583,4.209) 9(-9.583,3.189) 10(-9.583,2.169) 11(-9.583,1.149) 12(-9.583,0.129) 13(-9.583,-0.891) 14(-9.583,-1.911) 15(-9.583,-2.931) 16(-9.583,-3.951) 17(-9.583,-4.971) 18(-9.583,-5.991) 31(8.567,-5.991) 32(8.567,-4.971) 33(8.567,-3.951) 34(8.567,-2.931) 35(8.567,-1.911) 36(8.567,-0.891) 37(8.567,0.129) 38(8.567,1.149) 39(8.567,2.169) 40(8.567,3.189) 41(8.567,4.209) 42(8.567,5.229)
  silkscreen extent -10.41,-10.28 9.39,10.74, body extent -10.3,-10.17 9.28,9.41, height 2.9
LED1913X12NGREEN [mm] "LED 2-Leads, Body 1.90x1.32mm, IPC Medium Density"
  rect 1.1x1.25 smd: 1(-1.175,0) 2(1.175,0)
  silkscreen extent -1.99,-0.53 0.15,0.89, body extent -1.01,-0.62 1.01,0.63, height 1.1
LED1913X12NYEL/ORANGE [mm] "LED 2-Leads, Body 1.90x1.32mm, IPC Medium Density"
  rect 1.1x1.25 smd: 1(-1.175,0) 2(1.175,0)
  silkscreen extent -1.99,-0.53 0.15,0.89, body extent -1.01,-0.62 1.01,0.63, height 1.1
OSC_DSC6083CI2A-032K768 [mm]
  rect 1x0.9 smd: 1(-0.95,1.05) 2(-0.95,-1.05) 3(0.95,-1.05) 4(0.95,1.05)
  silkscreen extent -2.3,-1.6 1.25,1.6, body extent -1.78,-1.91 1.78,1.9, height 0.04
OSCSC320X250X100N [mm]
  rect 0.98x1.1 smd: 1(-0.85,1.1) 2(-0.85,-1.1) 3(0.85,-1.1) 4(0.85,1.1)
  silkscreen extent -1.84,1.16 -1.66,1.34, body extent -1.65,-2.03 1.65,2.03, height 0.9
PCBComponent_1 [mil]
  round 60 hole 30: 1(280,250)
"PCBComponent_1 - duplicate1" [mm]
  oval 1.725x3.55 hole 1.325 slot 3.15 at 90 deg: 1(-8.9,0) 2(8.9,0)
  round 0.93 hole 0.53: A1(-5.725,1.325) A2(-4.625,1.325) A3(-3.525,1.325) A4(-2.425,1.325) A5(-1.675,0.525) A6(-0.925,1.325) A7(0.925,1.325) A8(1.675,0.525) A9(2.425,1.325) A10(3.525,1.325) A11(4.625,1.325) A12(5.725,1.325) B1(5.35,-1.325) B2(4.25,-1.325) B3(3.15,-1.325) B4(2.05,-1.325) B5(1.3,-0.525) B6(0.55,-1.325) B7(-0.55,-1.325) B8(-1.3,-0.525) B10(-3.15,-1.325) B11(-4.25,-1.325) B12(-5.35,-1.325) G1(-4.95,0) G2(-3.85,0) G3(-2.75,0) G4(2.75,0) G5(3.85,0) G6(4.95,0)
  round 0.93 hole 0.53 paste+0: B9(-2.05,-1.325)
  silkscreen extent -9.86,-6.93 9.9,3.35, body extent -9.91,-6.98 9.95,3.4, height 10.65
QFN40P450X250X80-31N120X320 [mm]
  rect 0.58x0.22 smd: 1(-1.315,1.8) 2(-1.315,1.4) 3(-1.315,1) 4(-1.315,0.6) 5(-1.315,0.2) 6(-1.315,-0.2) 7(-1.315,-0.6) 8(-1.315,-1) 9(-1.315,-1.4) 10(-1.315,-1.8) 16(1.315,-1.8) 17(1.315,-1.4) 18(1.315,-1) 19(1.315,-0.6) 20(1.315,-0.2) 21(1.315,0.2) 22(1.315,0.6) 23(1.315,1) 24(1.315,1.4) 25(1.315,1.8)
  rect 0.22x0.58 smd: 11(-0.8,-2.315) 12(-0.4,-2.315) 13(0,-2.315) 14(0.4,-2.315) 15(0.8,-2.315) 26(0.8,2.315) 27(0.4,2.315) 28(0,2.315) 29(-0.4,2.315) 30(-0.8,2.315)
  rect 1.2x3.2 smd: 31(0,0)
  silkscreen extent -2.05,-2.25 1.25,2.25
QFN40P900X900X100-77N [mm]
  rect 0.86x0.22 smd: 1(-4.435,3.6) 2(-4.435,3.2) 3(-4.435,2.8) 4(-4.435,2.4) 5(-4.435,2) 6(-4.435,1.6) 7(-4.435,1.2) 8(-4.435,0.8) 9(-4.435,0.4) 10(-4.435,0) 11(-4.435,-0.4) 12(-4.435,-0.8) 13(-4.435,-1.2) 14(-4.435,-1.6) 15(-4.435,-2) 16(-4.435,-2.4) 17(-4.435,-2.8) 18(-4.435,-3.2) 19(-4.435,-3.6) 39(4.435,-3.6) 40(4.435,-3.2) 41(4.435,-2.8) 42(4.435,-2.4) 43(4.435,-2) 44(4.435,-1.6) 45(4.435,-1.2) 46(4.435,-0.8) 47(4.435,-0.4) 48(4.435,0) 49(4.435,0.4) 50(4.435,0.8) 51(4.435,1.2) 52(4.435,1.6) 53(4.435,2) 54(4.435,2.4) 55(4.435,2.8) 56(4.435,3.2) 57(4.435,3.6)
  rect 0.22x0.86 smd: 20(-3.6,-4.435) 21(-3.2,-4.435) 22(-2.8,-4.435) 23(-2.4,-4.435) 24(-2,-4.435) 25(-1.6,-4.435) 26(-1.2,-4.435) 27(-0.8,-4.435) 28(-0.4,-4.435) 29(0,-4.435) 30(0.4,-4.435) 31(0.8,-4.435) 32(1.2,-4.435) 33(1.6,-4.435) 34(2,-4.435) 35(2.4,-4.435) 36(2.8,-4.435) 37(3.2,-4.435) 38(3.6,-4.435) 58(3.6,4.435) 59(3.2,4.435) 60(2.8,4.435) 61(2.4,4.435) 62(2,4.435) 63(1.6,4.435) 64(1.2,4.435) 65(0.8,4.435) 66(0.4,4.435) 67(0,4.435) 68(-0.4,4.435) 69(-0.8,4.435) 70(-1.2,4.435) 71(-1.6,4.435) 72(-2,4.435) 73(-2.4,4.435) 74(-2.8,4.435) 75(-3.2,4.435) 76(-3.6,4.435)
  rect 5.81x6.31 smd: 77(0,0)
  silkscreen extent -4.5,-4.5 4.5,4.5, body extent -4.57,-4.57 4.53,4.53, height 1
SOIC127P600X172-8N [mil]
  rect 78x22 smd: 1(-97,75) 2(-97,25) 3(-97,-25) 4(-97,-75) 5(97,-75) 6(97,-25) 7(97,25) 8(97,75)
  silkscreen extent -52,-97 52,97, body extent -135,-100 140,100, height 71
SOIC127P600X175-8N [mm]
  rect 1.65x0.61 smd: 1(-2.635,1.905) 2(-2.635,0.635) 3(-2.635,-0.635) 4(-2.635,-1.905) 5(2.635,-1.905) 6(2.635,-0.635) 7(2.635,0.635) 8(2.635,1.905)
  silkscreen extent -4.23,-2.52 2,2.52, body extent -3.49,-2.52 3.49,2.52, height 1.8
SOP65P640X120-21N [mil]
  rect 58x14 smd: 1(-115,115) 2(-115,90) 3(-115,64) 4(-115,38) 5(-115,13) 6(-115,-13) 7(-115,-38) 8(-115,-64) 9(-115,-90) 10(-115,-115) 11(115,-115) 12(115,-90) 13(115,-64) 14(115,-38) 15(115,-13) 16(115,13) 17(115,38) 18(115,64) 19(115,90) 20(115,115)
  rect 94x134 smd: 21(0,0)
  silkscreen extent -76,-130 76,130, body extent -126,-128 126,128, height 35
TE_7-215079-8_0 [mm]
  rect 1.3x1.3 hole 0.8 paste-1000 mask+0: 1(-4.445,-1.27)
  round 1.3 hole 0.8 paste-1000 mask+0: 2(-3.175,1.27) 3(-1.905,-1.27) 4(-0.635,1.27) 5(0.635,-1.27) 6(1.905,1.27) 7(3.175,-1.27) 8(4.445,1.27)
  round 1.5 hole 1.5 unplated paste-1000 mask+0: ""(5.845,-0.53)
  silkscreen extent -6.1,-2.6 6.1,3.37, body extent -6.26,-2.5 7.28,2.5, height 1.9
TI_TPD4E05U06DQAR [mm]
  rect 0.55x0.3 smd: 1(-0.385,1) 2(-0.385,0.5) 4(-0.385,-0.5) 5(-0.385,-1) 6(0.385,-1) 7(0.385,-0.5) 9(0.385,0.5) 10(0.385,1)
  rect 0.55x0.4 smd: 3(-0.385,0) 8(0.385,0)
  silkscreen extent -1.17,-1.46 0.55,1.46, body extent -0.89,-1.52 0.89,1.52, height 0.5